# Altium PCB MY_PCB_11.PcbDoc (part 1 of 2)
Units mm, origin at the board's own origin, x right, y up, seen from the top; angles counter-clockwise.
Board outline 44.39 x 41.28 mm, 4 copper layers (L1 (SIG), L2 (GND), L3 (GND), L4 (SIG)), stack 1.57 mm thick; 69 components, 54 nets, 293 pads, 149 vias.
Unrouted connection lines stored in the file: 1.
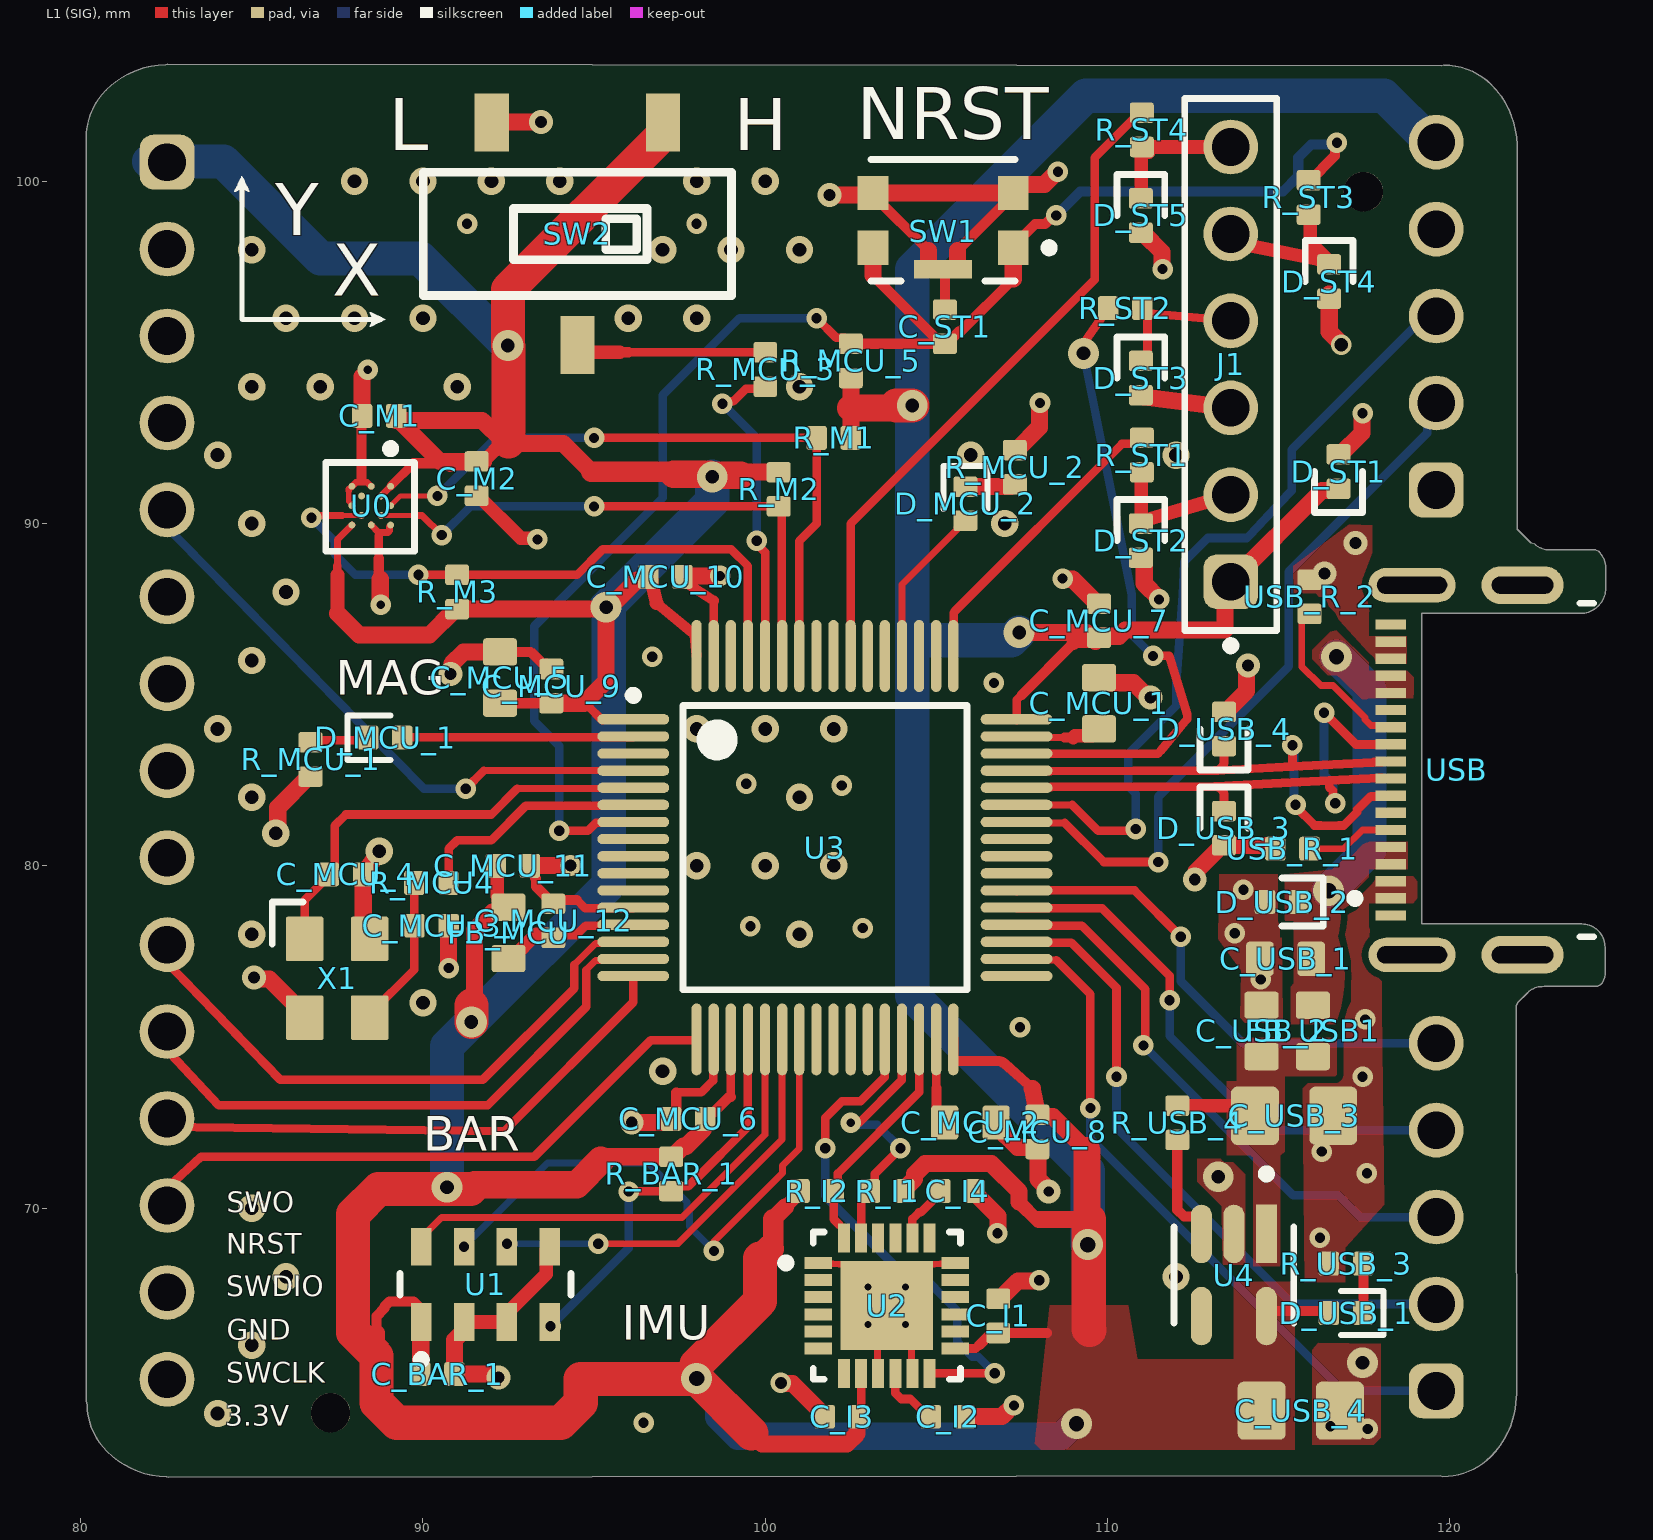
[diagram p0: L1 (SIG) view]
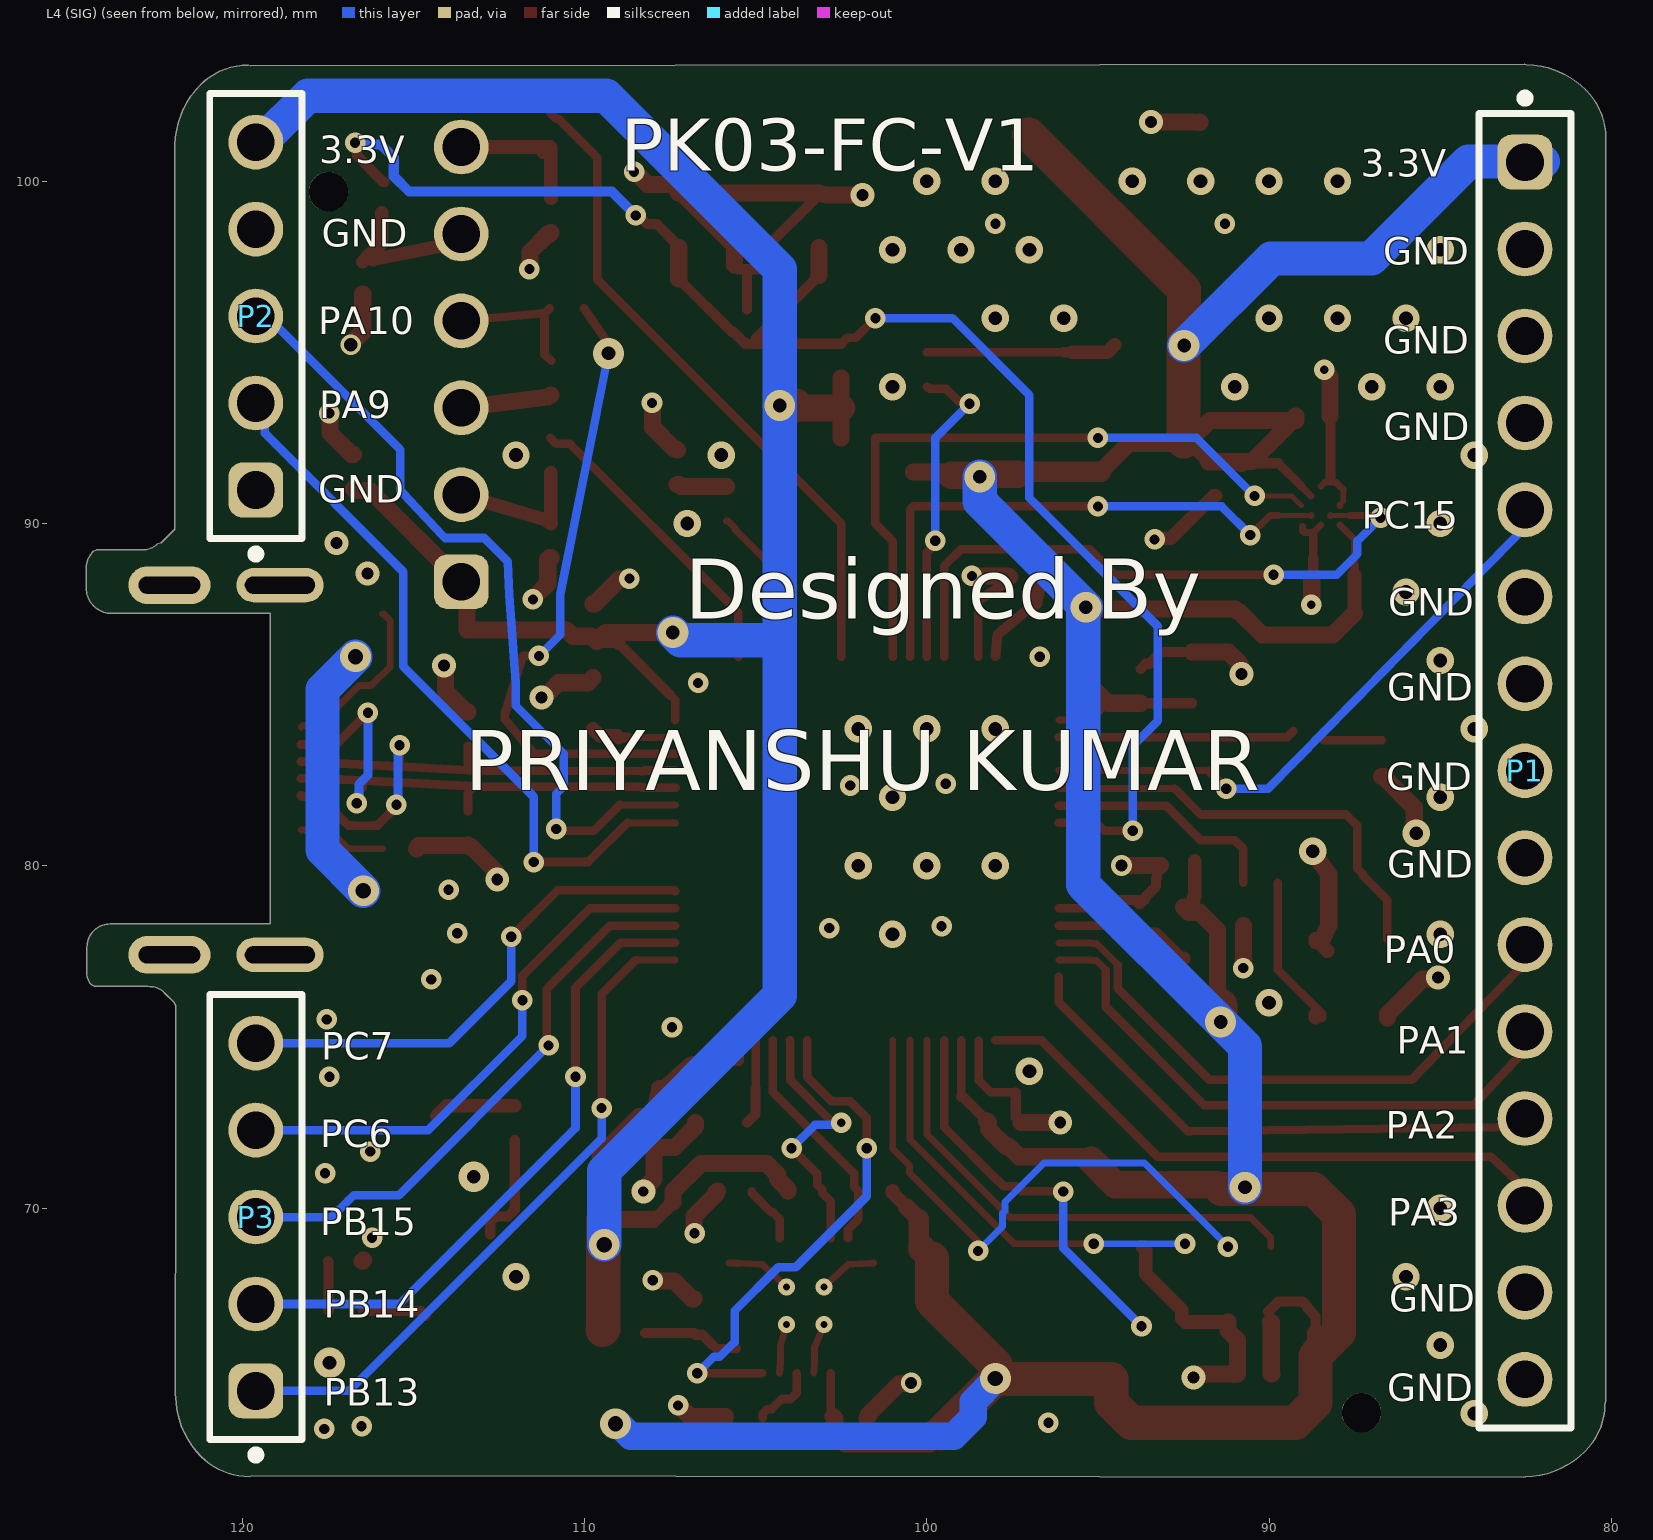
[diagram p1: L4 (SIG) view, seen from below]
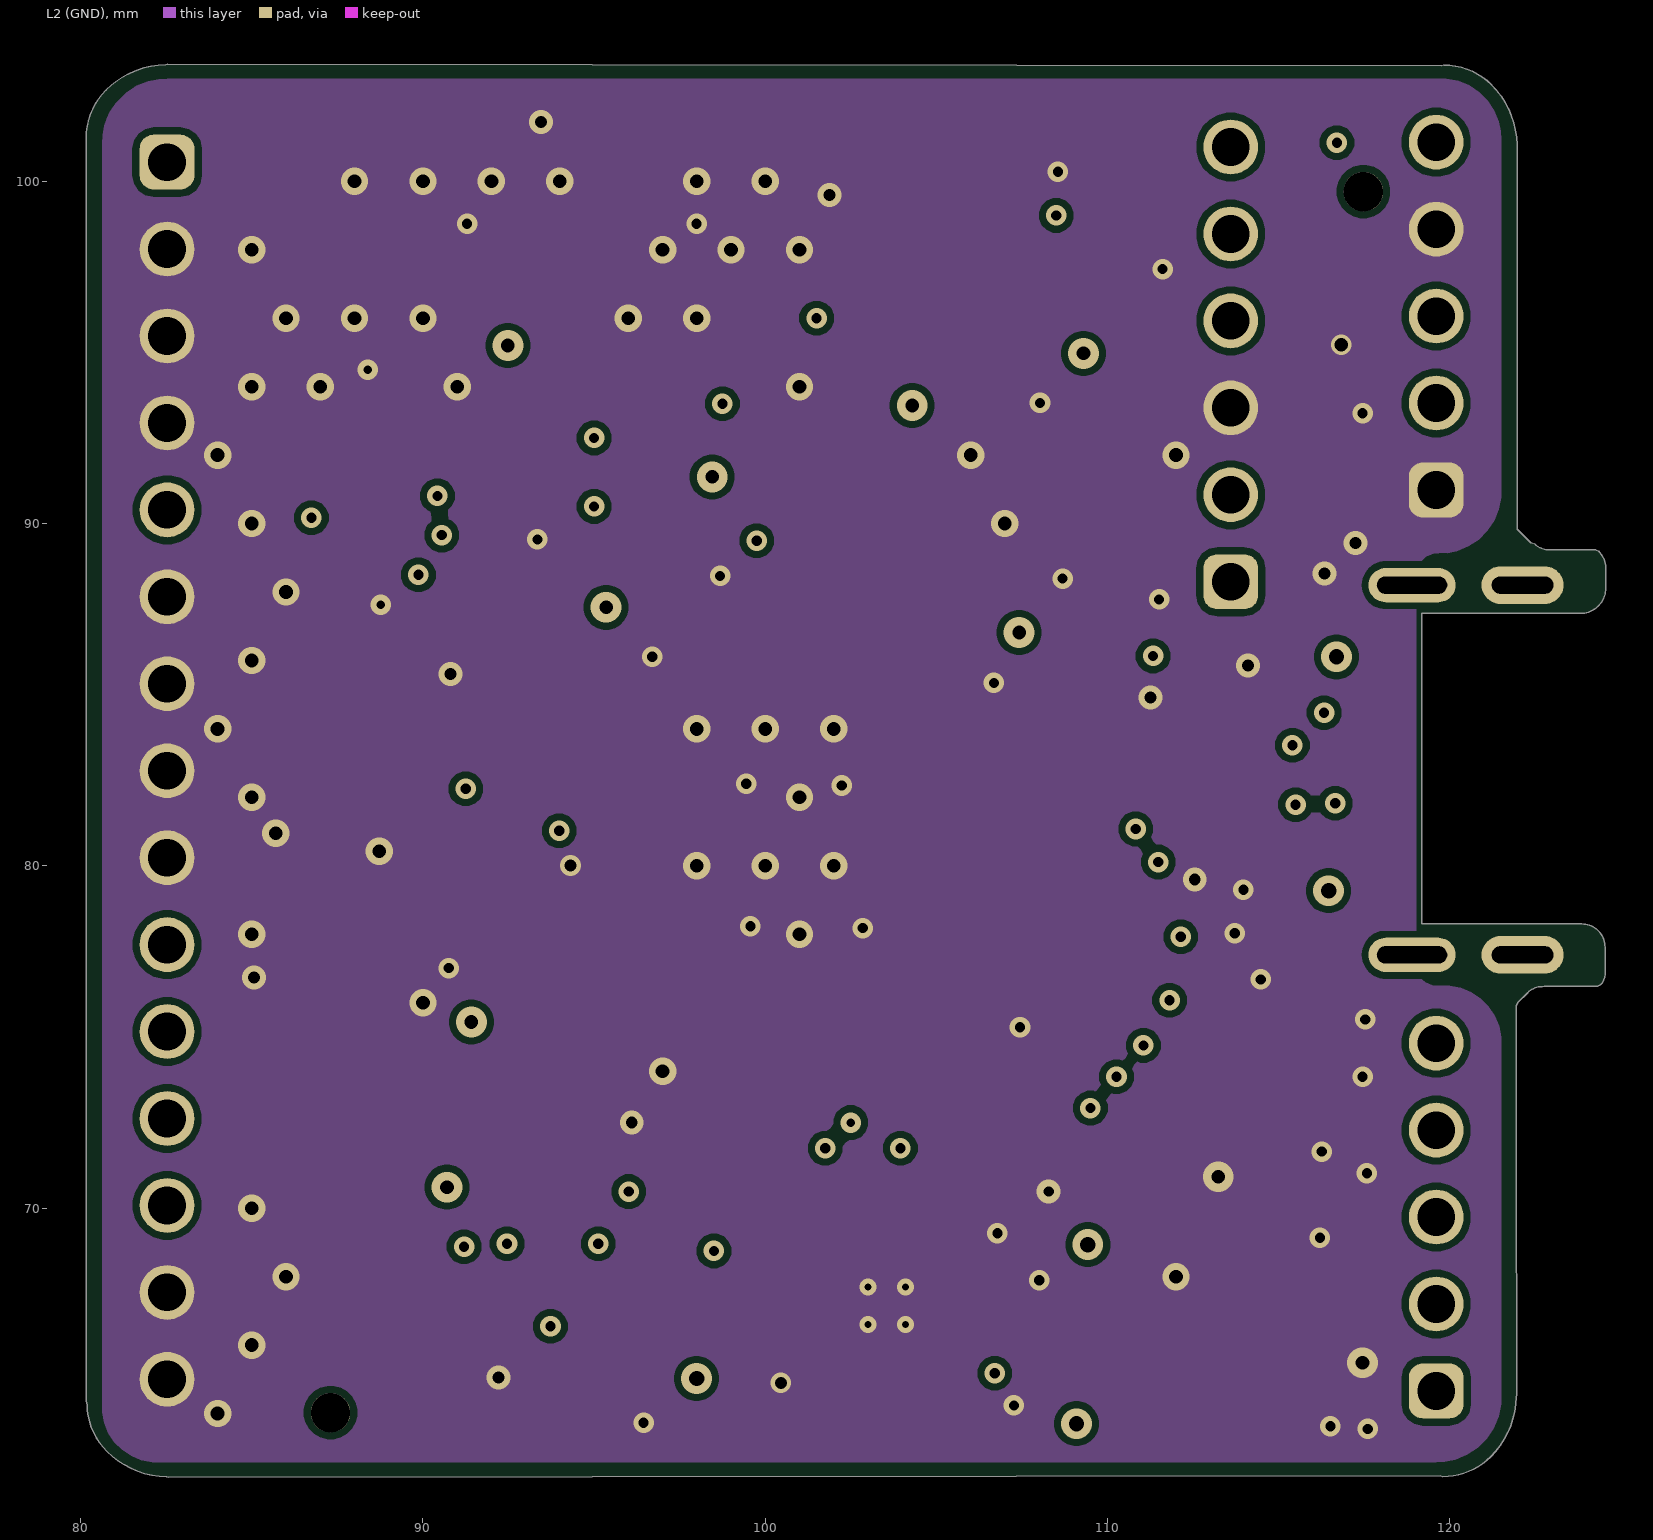
[diagram p2: L2 (GND)]
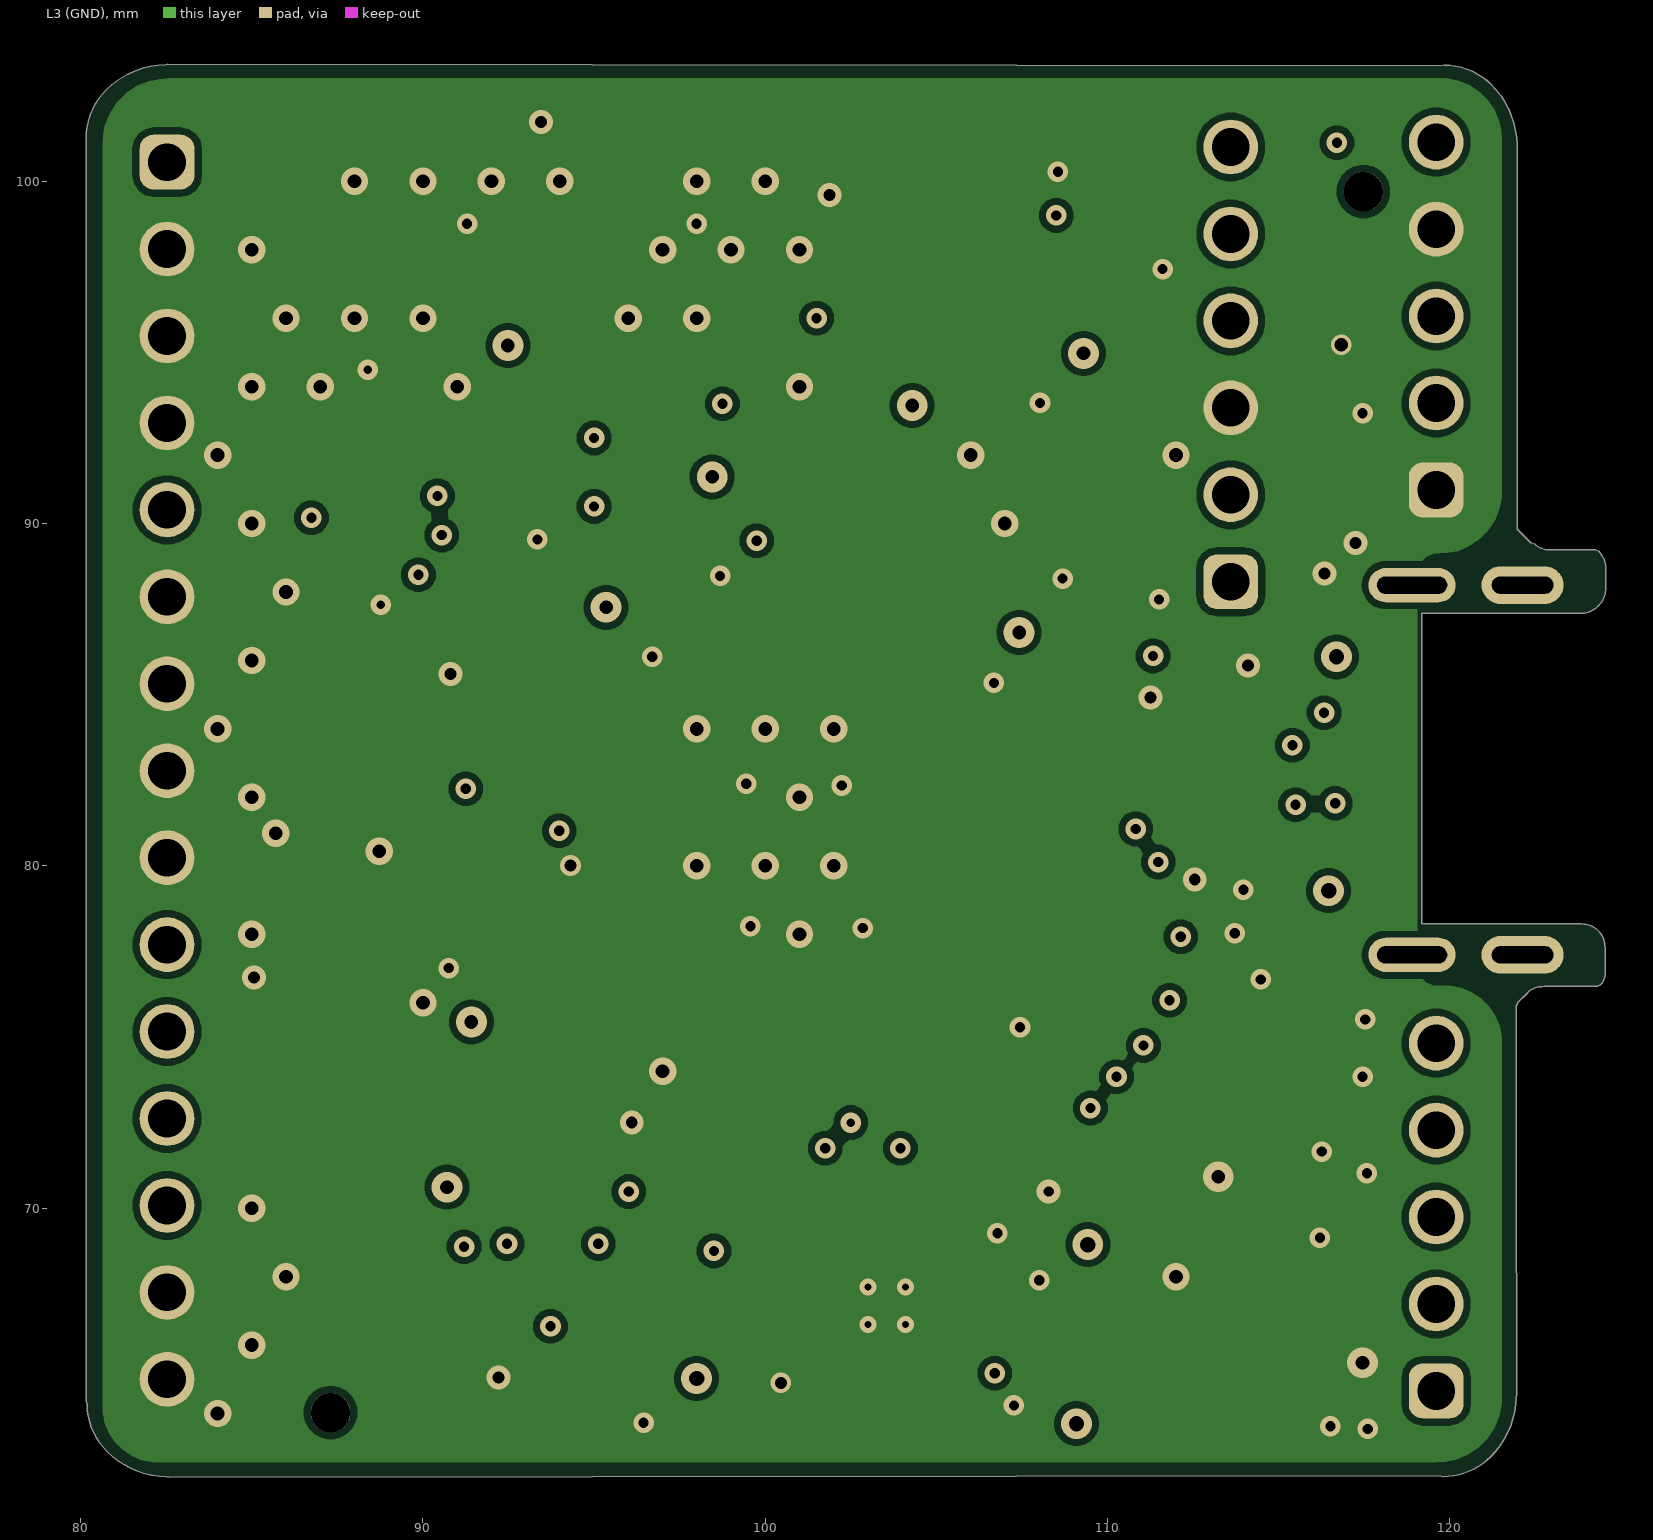
[diagram p3: L3 (GND)]
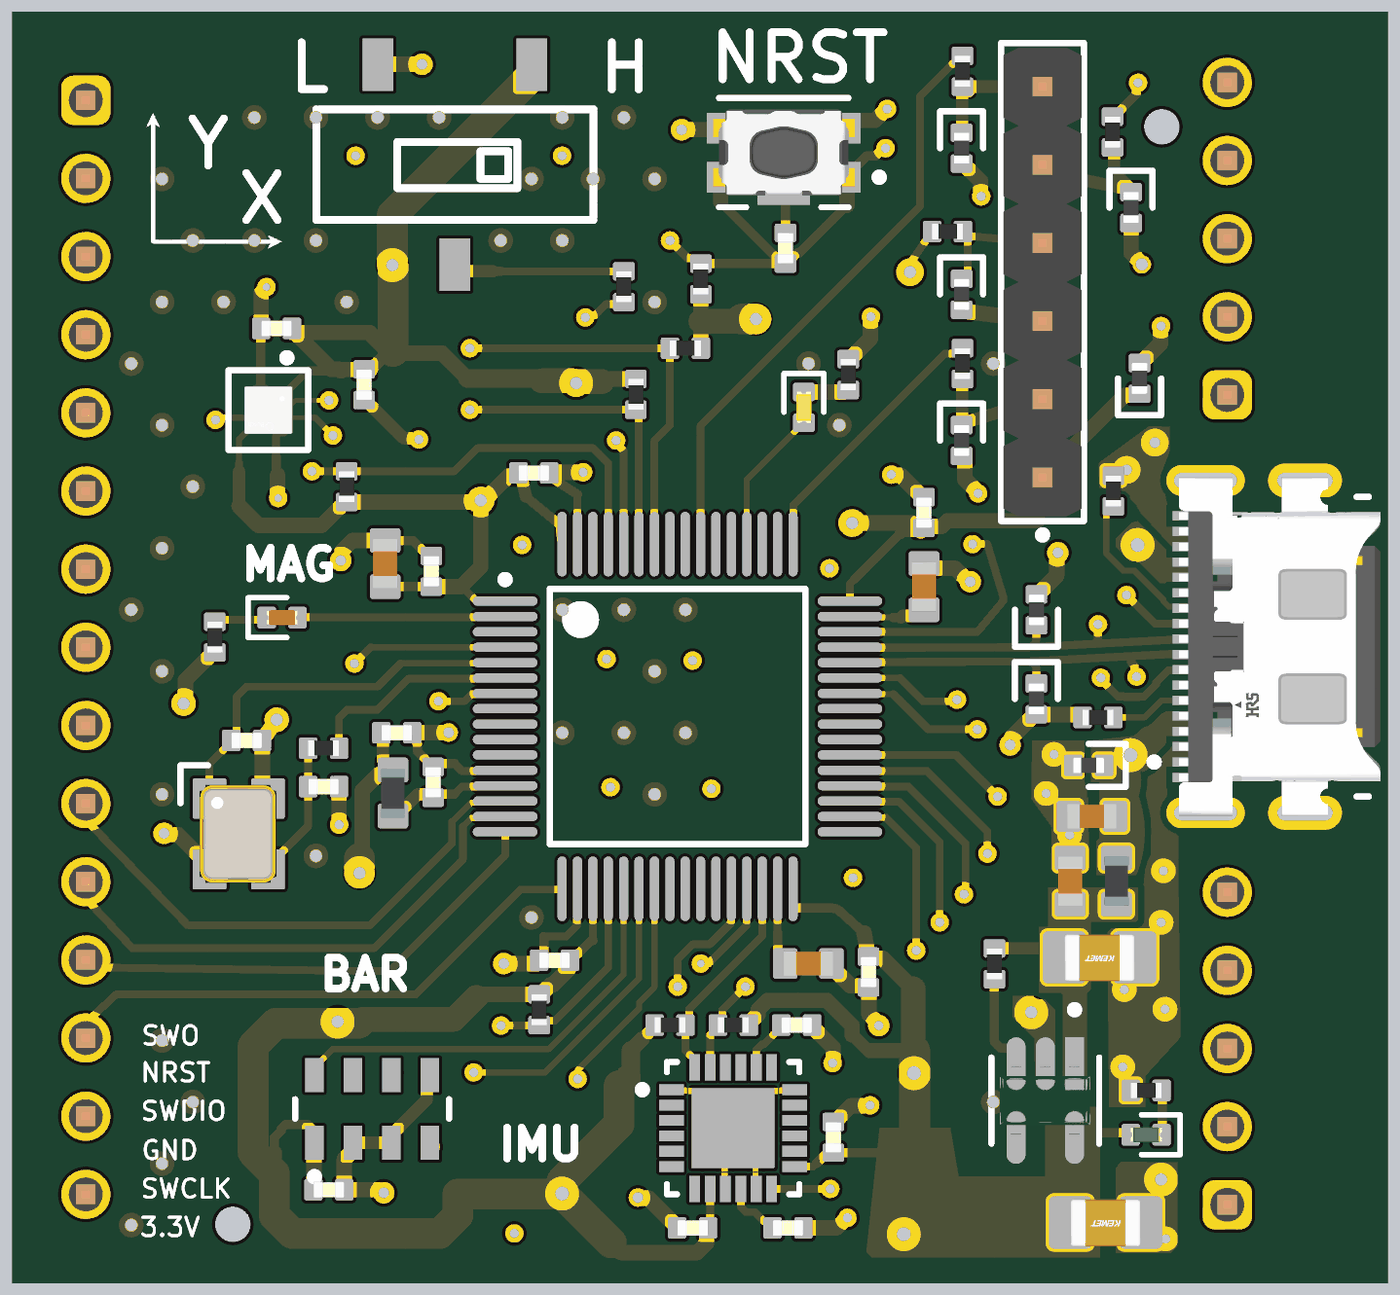
[diagram p4: 3D render of the assembled board from above, using the file's embedded part models]
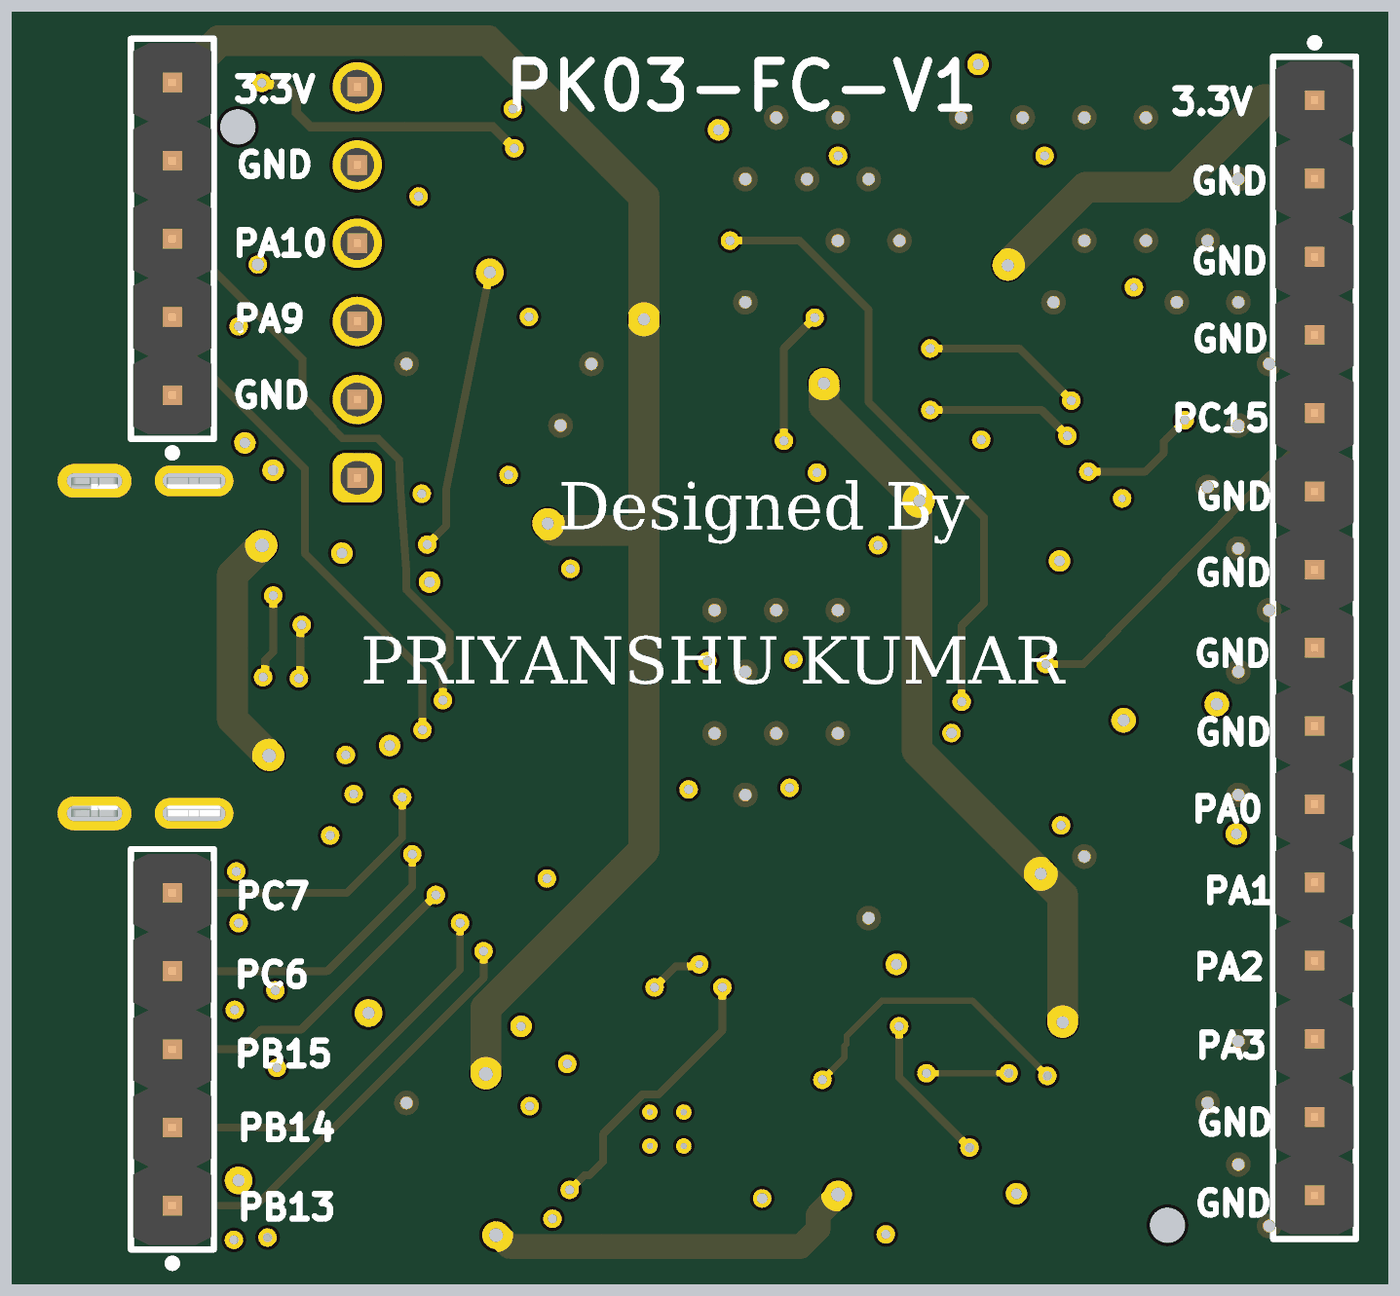
[diagram p5: 3D render of the assembled board from below, using the file's embedded part models]

## Layer stack, top to bottom
Top Solder: solder mask 0.0254, SM-001, Dk 4
L1 (SIG): signal copper 0.035
Dielectric 1: prepreg 0.2, PP-017, Dk 4.6
L2 (GND): signal copper 0.0175
Dielectric 3: core 1.065, Core-039, Dk 4.6
L3 (GND): signal copper 0.0175
Dielectric 5: prepreg 0.2, PP-017, Dk 4.6
L4 (SIG): signal copper 0.035
Bottom Solder: solder mask 0.0254, SM-001, Dk 4

## Board outline
80.768,62.894 ccw(c82.565,64.691) 82.511,62.15 82.565,62.138 119.721,62.181 119.793,62.158 ccw(c119.793,64.139) 121.194,62.739 ccw(c119.397,64.536) 121.938,64.482 121.95,64.536 121.942,71.659 121.942,75.903 121.985,76.007 122.273,76.295 cw(c122.695,75.873) 122.695,76.47 122.759,76.487 124.312,76.487 124.402,76.524 ccw(c124.082,76.844) 124.534,76.844 124.534,77.623 ccw(c123.854,77.623) 123.854,78.302 119.177,78.302 119.177,87.373 123.812,87.373 ccw(c123.812,88.116) 124.556,88.116 124.556,88.775 124.541,88.835 ccw(c123.848,88.69) 124.349,89.19 124.259,89.227 122.9,89.227 cw(c122.9,89.824) 122.478,89.402 122.362,89.437 121.968,89.83 121.968,95.679 121.974,101.018 121.962,101.072 ccw(c119.421,101.018) 121.219,102.815 ccw(c119.818,101.414) 119.818,103.395 119.75,103.376 82.54,103.419 82.486,103.407 ccw(c82.539,100.866) 80.742,102.664 ccw(c82.143,101.263) 80.162,101.263 80.162,64.356 80.188,64.254 ccw(c82.168,64.294)

## Design rules (kind name [scope] priority, off if disabled: settings)
Clearance [All] p1: gap=0.2 ignorepadtopadclearanceinfootprint=FALSE except(0.1: Arc-Arc Arc-Track Arc-SMDPad Track-Track Track-SMDPad SMDPad-SMDPad)
DiffPairsRouting [All] p1: maxlimit=0.254 minlimit=0.203 mostfreqgap=0.254 toplayer_maxgap=0.203 toplayer_prefgap=0.203 toplayer_minwidth=0.26 toplayer_maxwidth=0.26 toplayer_prefwidth=0.26 bottomlayer_maxgap=0.203 bottomlayer_prefgap=0.203 bottomlayer_minwidth=0.26 bottomlayer_maxwidth=0.26 bottomlayer_prefwidth=0.26 impedanceprofiledriven=TRUE impedanceprofileid={3583F297-3DA0-49DD-B7A2-160DF1068F61} impedanceprofilevalue=90.000000 maxuncoupledlength=12.7
MatchedLengths I2C_LIS2MDLTRT [InxSignalClass('All xSignals')] p1: tolerance=25.4 checknetsindiffpair=FALSE checkdiffpairvsdiffpair=TRUE checkxsignals=TRUE checkothers=TRUE targetsourcename=MAG_SCL_PP1
MatchedLengths SPI_BMP280 [InxSignalClass('All xSignals')] p2: tolerance=1.27 checknetsindiffpair=FALSE checkdiffpairvsdiffpair=TRUE checkxsignals=TRUE checkothers=TRUE targetsourcename=BAR_SDO_PP2
MatchedLengths USB [InDifferentialPair('USB')] p3: tolerance=2.54 checknetsindiffpair=TRUE checkdiffpairvsdiffpair=FALSE checkxsignals=FALSE checkothers=FALSE
PolygonConnect [All] p1: connectstyle=Direct reliefconductorwidth=0.254 reliefentries=4 polygonreliefangle="90 Angle" airgapwidth=0.254
RoutingVias [All] p1: holewidth=0.3 width=0.7 viastyle="Through Hole" minholewidth=0.25 minwidth=0.55 maxholewidth=0.4 maxwidth=0.9
SolderMaskExpansion [All] p1: expansion=0.102 istentingtop=FALSE
SupplyNets "Schematic Supply Nets" [InNet('GND')] p1: voltage=0.000
SupplyNets "Schematic Supply Nets_4" [InNet('VBUS')] p2: voltage=0.000
SupplyNets "Schematic Supply Nets_3" [InNet('+5V')] p3: voltage=0.000
SupplyNets "Schematic Supply Nets_1" [InNet('+3V3')] p4: voltage=0.000
UnRoutedNet [All] p1: checkbadconnections=TRUE
Width [All] p1: maxlimit=1 minlimit=0.15 preferedwidth=0.3 midlayer1_minwidth=0.254 midlayer1_maxwidth=0.254 midlayer1_prefwidth=0.254 midlayer2_minwidth=0.254 midlayer2_maxwidth=0.254 midlayer2_prefwidth=0.254 bottomlayer_minwidth=0.2 minimp=50.000000 maximp=50.000000 favimp=50.000000
28 further rules are at their usual default settings.

## Classes and differential pairs
differential pair class USB_DIFF: USB
component class Power_Supply: C_USB_1 C_USB_2 C_USB_3 C_USB_4 D_USB_1 D_USB_2 D_USB_3 D_USB_4 FB_USB1 R_USB_3 R_USB_4 U4 USB USB_R_1 USB_R_2
differential pair USB: +USB_P -USB_N

## Components (designator, comment, footprint, x,y, rotation, side; value= is the part's Value field where it differs from the comment)
C_BAR_1 "100nF_16V" CAP_0402 90.42,65.15 r180 top
C_I1 "100nF_16V" CAP_0402 106.807,66.853 r270 top
C_I2 "100nF_16V" CAP_0402 105.334,63.906 r180 top
C_I3 "10nF_16V" CAP_0402 102.235,63.906 r0 top
C_I4 "2n2F_16V" CAP_0402 105.615,70.5 r180 top
C_M1 "100nF_16V" CAP_0402 88.72,93.143 r0 top
C_M2 "100nF_16V" CAP_0402 91.567,91.313 r90 top
C_MCU_1 "2u2F_16V" CAP_0603 109.75,84.75 r270 top
C_MCU_2 "2u2F_16V" CAP_0603 105.993,72.5 r180 top
C_MCU_3 "10pF_16V" CAP_0402 90.25,78.25 r180 top
C_MCU_4 "10pF_16V" CAP_0402 87.75,79.75 r180 top
C_MCU_5 "2u2F_16V" CAP_0603 92.25,85.5 r270 top
C_MCU_6 "100nF_16V" CAP_0402 97.75,72.607 r0 top
C_MCU_7 "100nF_16V" CAP_0402 109.75,87.157 r270 top
C_MCU_8 "100nF_16V" CAP_0402 107.95,72.225 r90 top
C_MCU_9 "100nF_16V" CAP_0402 93.75,85.25 r270 top
C_MCU_10 "100nF_16V" CAP_0402 97.079,88.443 r180 top
C_MCU_11 "100nF_16V" CAP_0402 92.625,80 r180 top
C_MCU_12 "100nF_16V" CAP_0402 93.807,78.393 r270 top
C_ST1 "100nF_16V" CAP_0402 105.25,95.75 r270 top
C_USB_1 "2u2F_16V" CAP_0603 115.2,77.285 r0 top
C_USB_2 "2u2F_16V" CAP_0603 114.5,75.178 r270 top
C_USB_3 "22uF_16V" CAP_0805 115.45,72.7 r180 top
C_USB_4 "22uF_16V" CAP_0805 115.646,64.084 r180 top
D_MCU_1 "RED" LED_0402_RED 88.9,83.744 r180 top
D_MCU_2 "YELLOW" LED_0402_YELLOW 105.849,90.576 r90 top
D_ST1 "D_TVS_0402" D_0402 116.75,91.518 r270 top
D_ST2 "D_TVS_0402" D_0402 110.971,89.5 r90 top
D_ST3 "D_TVS_0402" D_0402 110.971,94.25 r90 top
D_ST4 "D_TVS_0402" D_0402 116.475,97.069 r90 top
D_ST5 "D_TVS_0402" D_0402 110.971,99 r90 top
D_USB_1 "GREEN" LED_0402_GREEN 116.967,66.936 r0 top
D_USB_2 "D_TVS_0402" D_0402 115.1,78.941 r0 top
D_USB_3 "D_TVS_0402" D_0402 113.4,81.1 r90 top
D_USB_4 "D_TVS_0402" D_0402 113.403,83.997 r270 top
FB_MCU "120R" FB_0603 92.5,78.043 r270 top
FB_USB1 "120R" FB_0603 116,75.178 r270 top
J1 "61300611121" 61300611121 113.599,94.65 r90 top
P1 "61301511121" 61301511121 82.525,82.779 r270 bottom
P2 "61300511121" 61300511121 119.6,96.06 r90 bottom
P3 "61300511121" 61300511121 119.6,69.74 r90 bottom
R_BAR_1 "10K" RES_0402 97.25,71 r270 top
R_I1 "2k2" RES_0402 103.557,70.5 r0 top
R_I2 "2k2" RES_0402 101.5,70.5 r180 top
R_M1 "2k2" RES_0402 102,92.5 r0 top
R_M2 "2k2" RES_0402 100.393,91 r90 top
R_M3 "10K" RES_0402 91,88 r90 top
R_MCU4 "49R9" RES_0402 90.25,79.5 r0 top
R_MCU_1 "560R" RES_0402 86.716,83.109 r270 top
R_MCU_2 "560R" RES_0402 107.29,91.643 r90 top
R_MCU_3 "10K" RES_0402 100,94.5 r270 top
R_MCU_5 "10K" RES_0402 102.5,94.75 r90 top
R_ST1 "22R" RES_0402 111,92 r90 top
R_ST2 "22R" RES_0402 110.515,96.291 r180 top
R_ST3 "22R" RES_0402 115.875,99.525 r90 top
R_ST4 "22R" RES_0402 111,101.5 r90 top
R_USB_3 "1k" RES_0402 116.967,68.377 r0 top
R_USB_4 "10K" RES_0402 112.039,72.492 r270 top
SW1 "KMR221GLFS" FP-KMR221GLFS-MFG 105.194,98.856 r180 top
SW2 "SW-SMD-K3-1235S-K1" SW-SMD-K3-1235S-K1 94.5,98.5 r180 top
U0 "BMM150" FP-BMM150-MFG 88.455,90.487 r270 top
U1 "MS560702BA03-50" TECO-MS560702BA03-50_V 91.825,67.775 r90 top
U2 "MPU-6050" IS-QFN-24_V 103.55,67.15 r0 top
U3 "STM32F405RGT6" STM-LQFP64_M 101.744,80.531 r0 top
U4 "AP2112K-3.3TRG1" FP-SOT25-IPC_A 113.69,68.047 r270 top
USB "CX90M-16P" FP-CX90M-16P-MFG 121.3,82.8 r90 top
USB_R_1 "5k1" RES_0402 115.4,80.5 r180 top
USB_R_2 "5k1" RES_0402 115.9,87.859 r90 top
X1 "24MHz" XTAL_3225 87.493,76.713 r270 top

## Footprints (in the part's own frame and the unit in brackets; to place one, negate y for a bottom-side part, rotate by r counter-clockwise, add the part's x,y. Pads: shape width x height; smd on the part's side, far side on the other; paste and mask are expansions set on the pad)
61300511121 [mm] "Pin Header, pitch 2.54 mm, THT, Vertical, single row, 5p"
  rrect50% 1.6x1.6 hole 1.1: 1(-5.08,0)
  round 1.6 hole 1.1: 2(-2.54,0) 3(0,0) 4(2.54,0) 5(5.08,0)
  silkscreen extent -7.07,-1.35 6.5,1.35, body extent -6.35,-1.27 6.35,1.27, height 8.57
61300611121 [mm] "Pin Header, pitch 2.54 mm, THT, Vertical, single row, 6p"
  rrect50% 1.6x1.6 hole 1.1: 1(-6.35,0)
  round 1.6 hole 1.1: 2(-3.81,0) 3(-1.27,0) 4(1.27,0) 5(3.81,0) 6(6.35,0)
  silkscreen extent -8.34,-1.35 7.77,1.35, body extent -7.62,-1.27 7.62,1.27, height 8.57
61301511121 [mm] "Pin Header, pitch 2.54 mm, THT, Vertical, single row, 15p"
  rrect50% 1.6x1.6 hole 1.1: 1(-17.78,0)
  round 1.6 hole 1.1: 2(-15.24,0) 3(-12.7,0) 4(-10.16,0) 5(-7.62,0) 6(-5.08,0) 7(-2.54,0) 8(0,0) 9(2.54,0) 10(5.08,0) 11(7.62,0) 12(10.16,0) 13(12.7,0) 14(15.24,0) 15(17.78,0)
  silkscreen extent -19.77,-1.35 19.2,1.35, body extent -19.05,-1.27 19.05,1.27, height 8.57
CAP_0402 [mm]
  rrect25% 0.6x0.7 smd: 1(-0.5,0) 2(0.5,0)
  body extent -0.5,-0.26 0.5,0.26, height 0.37
CAP_0603 [mm]
  rrect25% 0.8x1 smd: 1(-0.75,0) 2(0.75,0)
  body extent -0.8,-0.4 0.8,0.4, height 0.51
CAP_0805 [mm]
  rrect25% 1.4x1.7 smd: 1(-1.143,0) 2(1.143,0)
  body extent -1.15,-0.76 1.15,0.79, height 1.01
D_0402 [mm]
  rrect25% 0.6x0.7 smd: A(-0.5,0) K(0.5,0)
  silkscreen extent 0,-0.7 1.2,0.7, body extent -0.5,-0.25 0.5,0.25, height 0.51
FB_0603 [mm]
  rrect25% 0.8x1 smd: 1(-0.75,0) 2(0.75,0)
  body extent -0.8,-0.4 0.8,0.4, height 0.81
FP-BMM150-MFG [mm]
  round 0.2 smd paste+0 mask+0: A1(-0.601,0.601) A3(-0.035,0.601) A5(0.531,0.601) B2(-0.318,0.318) B4(0.248,0.318) C1(-0.601,0.035) C5(0.531,0.035) D2(-0.318,-0.248) D4(0.248,-0.248) E1(-0.601,-0.531) E3(-0.035,-0.531) E5(0.531,-0.531)
  silkscreen extent -1.82,-1.3 1.3,1.29, body extent -1.3,-1.3 1.3,1.29, height 0.25
FP-CX90M-16P-MFG [mm]
  rect 0.3x0.9 smd paste+0 mask+0: 1(-4.25,3.025) 2(4.25,3.025) A1(-3.75,3.025) A4(-2.75,3.025) A5(-1.75,3.025) A6(-0.75,3.025) A7(0.75,3.025) A8(1.75,3.025) A9(2.75,3.025) A12(3.75,3.025) B1(3.25,3.025) B4(2.25,3.025) B5(1.25,3.025) B6(0.25,3.025) B7(-0.25,3.025) B8(-1.25,3.025) B9(-2.25,3.025) B12(-3.25,3.025)
  rrect100% 1x2.55 hole 2.05 slot 0.5 at 0 deg paste-2539.97 mask+0: 3(-5.4,2.405) 4(5.4,2.405)
  rrect100% 1.1x2.4 hole 1.8 slot 0.5 at 0 deg paste-2539.97 mask+0: 5(-5.4,-0.825) 6(5.4,-0.825)
  silkscreen extent -4.87,-2.9 4.87,4.2, body extent -6.05,-3.37 6.05,3.78, height 0.25
FP-KMR221GLFS-MFG [mm]
  rect 0.9x1 smd paste+0 mask+0: 1(-2.05,0.8) 2(2.05,0.8) 3(-2.05,-0.8) 4(2.05,-0.8)
  rect 1.7x0.55 smd paste+0 mask+0: 5(0,1.425)
  silkscreen extent -3.22,-1.78 2.1,1.77, body extent -2.6,-1.5 2.6,1.8, height 0.25
FP-SOT25-IPC_A [mm]
  rect 1.707x0.616 smd paste+0 mask+0: 1(-1.201,0.95)
  rrect100% 1.707x0.616 smd paste+0 mask+0: 2(-1.201,0) 3(-1.201,-0.95) 4(1.201,-0.95) 5(1.201,0.95)
  silkscreen extent -3.08,-1.75 1.4,1.75, body extent -2.55,-2 2.55,2, height 0.25
IS-QFN-24_V [mm] "QFN, 24-Leads, Body 4x4mm, Pitch 0.5mm, Thermal Pad 2.7x2.6mm"
  rect 0.8x0.35 smd: 1(-2,1.25) 2(-2,0.75) 3(-2,0.25) 4(-2,-0.25) 5(-2,-0.75) 6(-2,-1.25) 13(2,-1.25) 14(2,-0.75) 15(2,-0.25) 16(2,0.25) 17(2,0.75) 18(2,1.25)
  rect 0.35x0.85 smd mask+0.102: 7(-1.25,-1.975) 8(-0.75,-1.975) 9(-0.25,-1.975) 10(0.25,-1.975) 11(0.75,-1.975) 12(1.25,-1.975) 19(1.25,1.975) 20(0.75,1.975) 21(0.25,1.975) 22(-0.25,1.975) 23(-0.75,1.975) 24(-1.25,1.975)
  rect 2.7x2.6 smd: 25(0,0)
  silkscreen extent -3.07,-2.15 2.15,2.15, body extent -2,-2 2,2, height 0.95
LED_0402_GREEN [mm]
  rrect25% 0.6x0.7 smd: A(-0.5,0) K(0.5,0)
  silkscreen extent -0.15,-0.65 1.1,0.65, body extent -0.51,-0.25 0.51,0.25, height 0.45
LED_0402_RED [mm]
  rrect25% 0.6x0.7 smd: A(-0.5,0) K(0.5,0)
  silkscreen extent -0.15,-0.65 1.1,0.65, body extent -0.51,-0.25 0.51,0.25, height 0.45
LED_0402_YELLOW [mm]
  rrect25% 0.6x0.7 smd: A(-0.5,0) K(0.5,0)
  silkscreen extent -0.15,-0.65 1.1,0.65, body extent -0.51,-0.25 0.51,0.25, height 0.45
RES_0402 [mm]
  rrect25% 0.6x0.7 smd: 1(-0.5,0) 2(0.5,0)
  body extent -0.5,-0.25 0.5,0.25, height 0.3
STM-LQFP64_M [mm] "Thin QFP, 64-Leads, Body 10x10mm, Pitch 0.5mm, IPC Low Density"
  oval 2.1x0.3 smd: 1(-5.6,3.75) 2(-5.6,3.25) 3(-5.6,2.75) 3(5.6,-3.75) 4(-5.6,2.25) 5(-5.6,1.75) 6(-5.6,1.25) 7(-5.6,0.75) 8(-5.6,0.25) 9(-5.6,-0.25) 10(-5.6,-0.75) 11(-5.6,-1.25) 12(-5.6,-1.75) 13(-5.6,-2.25) 14(-5.6,-2.75) 15(-5.6,-3.25) 16(-5.6,-3.75) 34(5.6,-3.25) 35(5.6,-2.75) 36(5.6,-2.25) 37(5.6,-1.75) 38(5.6,-1.25) 39(5.6,-0.75) 40(5.6,-0.25) 41(5.6,0.25) 42(5.6,0.75) 43(5.6,1.25) 44(5.6,1.75) 45(5.6,2.25) 46(5.6,2.75) 47(5.6,3.25) 48(5.6,3.75)
  oval 0.3x2.1 smd: 17(-3.75,-5.6) 18(-3.25,-5.6) 19(-2.75,-5.6) 20(-2.25,-5.6) 21(-1.75,-5.6) 22(-1.25,-5.6) 23(-0.75,-5.6) 24(-0.25,-5.6) 25(0.25,-5.6) 26(0.75,-5.6) 27(1.25,-5.6) 28(1.75,-5.6) 29(2.25,-5.6) 30(2.75,-5.6) 31(3.25,-5.6) 32(3.75,-5.6) 49(3.75,5.6) 50(3.25,5.6) 51(2.75,5.6) 52(2.25,5.6) 53(1.75,5.6) 54(1.25,5.6) 55(0.75,5.6) 56(0.25,5.6) 57(-0.25,5.6) 58(-0.75,5.6) 59(-1.25,5.6) 60(-1.75,5.6) 61(-2.25,5.6) 62(-2.75,5.6) 63(-3.25,5.6) 64(-3.75,5.6)
  silkscreen extent -5.72,-4.15 4.15,4.57, body extent -5,-5 5,5, height 1.6
SW-SMD-K3-1235S-K1 [mm]
  rect 1x1.7 smd: 1(-2.512,-3.214) 2(-0.012,3.286) 3(2.488,-3.214)
  silkscreen extent -4.51,-1.76 4.49,1.84
TECO-MS560702BA03-50_V [mm] "SMD, 8-Leads, Body 3x5mm, Pitch 1.25mm"
  rect 1.1x0.6 smd: 1(-1.1,1.875) 2(-1.1,0.625) 3(-1.1,-0.625) 4(-1.1,-1.875) 5(1.1,-1.875) 6(1.1,-0.625) 7(1.1,0.625) 8(1.1,1.875)
  silkscreen extent -2.32,-2.5 0.32,2.5, body extent -1.5,-2.5 1.5,2.5, height 1
XTAL_3225 [mm]
  rrect10% 1.3x1.1 smd: 1(-1.15,-0.95) 2(1.15,-0.95) 3(1.15,0.95) 4(-1.15,0.95)
  silkscreen extent -2.23,-1.89 -1,-1, body extent -1.6,-1.28 1.6,1.23, height 0.61

## Part data
C_BAR_1 C_I1 C_I2 C_I3 C_I4 C_M1 C_M2 C_MCU_3 C_MCU_4 C_MCU_6 C_MCU_7 C_MCU_8 C_MCU_9 C_MCU_10 C_MCU_11 C_MCU_12 C_ST1: library part CAP_0402, "Capacitor SMD 0402"
C_MCU_1 C_MCU_2 C_MCU_5 C_USB_1 C_USB_2: library part CAP_0603, "Capacitor SMD 0603"
C_USB_3 C_USB_4: library part CAP_0805, "Capacitor SMD 0805"
D_MCU_1: library part LED_0402_RED, "LED 0402 RED SMD"
D_MCU_2: library part LED_0402_YELLOW, "LED 0402 YELLOW SMD"
D_ST1 D_ST2 D_ST3 D_ST4 D_ST5 D_USB_2 D_USB_3 D_USB_4: "Diode TVS / ESD 0402"
D_USB_1: library part LED_0402_GREEN, "LED 0402 GREEN SMD"
FB_MCU FB_USB1: library part FB_0603, "Ferrite Bead SMD 0603"
J1: library part CMP-1502-01070-3, Color=Black, Contact Resistance=20mΩ, Current Rating=3A, Max Operating Temperature=105°C, Min Operating Temperature=-40°C, Operating Supply Voltage=250V, Connector Type="Male Pin", Contact Gender=Male, Contact Material=Copper, Contact Mating Length=5.9944mm, Contact Plating=Gold, Gender=Male, Height=8.89mm, Housing Material=PBT, Lead Free="Lead Free", Lead Pitch=2.54mm, Mount="Through Hole", NexarPartId=20084590, Number Of Contacts=6, Number of Pins=6, Number of Positions=6, Number of Rows=1, Orientation=Vertical, Packaging=Bulk, Pitch=2.54mm, REACH SVHC=Unknown, RoHS=Compliant, Termination="Through Hole", Voltage Rating=250V
P1: library part CMP-207987-000006-3, "CONN HEADER VERT 15POS 2.54MM", Color=Black, Current Rating=3A, Max Operating Temperature=105°C, Min Operating Temperature=-40°C, Voltage Rating=250V, Connector Type="Male Pin", Contact Material=Copper, Contact Mating Length=5.9944mm, Contact Plating=Gold, Gender=Male, Height=8.89mm, Mount="Through Hole", NexarPartId=32855546, Number Of Contacts=15, Number of Positions=15, Number of Rows=1, Packaging=Bulk, Pitch=2.54mm, REACH SVHC=Unknown, RoHS=Compliant, Termination=Solder
P2 P3: library part CMP-1502-01068-3, Color=Black, Contact Resistance=20mΩ, Current Rating=3A, Max Operating Temperature=105°C, Min Operating Temperature=-40°C, Operating Supply Voltage=250V, Connector Type="Male Pin", Contact Material=Copper, Contact Mating Length=5.9944mm, Contact Plating=Gold, Gender=Male, Height=8.89mm, Lead Free="Lead Free", Lead Pitch=2.54mm, Mount="Through Hole", NexarPartId=32855526, Number Of Contacts=5, Number of Pins=5, Number of Positions=5, Number of Rows=1, Orientation=Vertical, Packaging=Bulk, Pitch=2.54mm, REACH SVHC=Unknown, RoHS=Compliant, Termination=Solder, Voltage Rating=250V
R_BAR_1 R_I1 R_I2 R_M1 R_M2 R_M3 R_MCU4 R_MCU_1 R_MCU_2 R_MCU_3 R_MCU_5 R_ST1 R_ST2 R_ST3 R_ST4 R_USB_3 R_USB_4 USB_R_1 USB_R_2: library part RES_0402, "Resistor SMD 0402"
SW1: library part CMP-10040-000018-1, "SWITCH TACTILE SPST-NO 0.05A 32V", Case/Package=SMD/SMT, Contact Current Rating=50mA, Contact Resistance=100mR, Max Operating Temperature=85°C, Max Voltage Rating (DC)=32V, Min Operating Temperature=-40°C, Operating Force=2N, Package Quantity=1, Power Rating=1W, Actuator Length=0.5mm, Actuator Type=Standard, Contact Material=Silver, Contact Plating=Silver, Current Rating=50mA, Depth=4.6mm, Illumination Type=Non-Illuminated, Lead Free="Lead Free", Length=2.8mm, Max Current Rating=50mA, Mechanical Life=200000Cycles, Mount="Surface Mount", Orientation=Straight, Packaging="Tape and Reel", Radiation Hardening=No, REACH SVHC="No SVHC", Switch Function=Off-Mom, Switch Travel=0.25mm, Termination="Gull Wing", Throw Configuration=SPST, Voltage Rating (DC)=32V, Width=2.8mm
U0: library part CMP-191063-000001-2, "SENSOR FLIPCORE/HALL SPI 12WLCSP", Case/Package=SMD/SMT, Max Operating Temperature=85°C, Max Supply Current=20mA, Min Operating Temperature=-40°C, Operating Supply Voltage=3.6V, Package Quantity=10000, Axis="X, Y, Z", Bandwidth=10Hz, Output Type=SPI, Packaging="Tape and Reel", Resolution=13b
U1: library part CMP-2000-07512-1, "Barometric Pressure Sensor, with Stainless Steel Cap , 1.8 to 3.6 V, -40 to 85 degC, 8-Pin SMD, RoHS, Tape and Reel", Manufacturer="TE Connectivity", Package Description="8-Pin Surface Mount Device, Body 3 x 5 mm, Pitch 1.25 mm", Datasheet URL=http://www.te.com/commerce/DocumentDelivery/DDEController?Action=showdoc&DocId=Data+Sheet%7FMS5607-02BA03%7FB2%7Fpdf%7FEnglish%7FENG_DS_MS5607-02BA03_B2.pdf%7FMS560702BA03-50, Datasheet Version=06/2017, Lead Free=LeadFree, Manufacturer URL=http://www.te.com/, Mounting Technology=SurfaceMount, Package Reference=MS560702BA03-50, RoHSCompliant=false
U2: library part CMP-1753-00002-2, "3-Axis Gyroscope, Accelerometer and a Digital Motion Processor(TM) (DMP), 2.375 to 3.46 V, -40 to 85 degC, 24-Pin QFN, RoHS, Tape and Reel", Manufacturer=InvenSense, Standard Package=5,000, Category=Sensors,Transducers, Datasheet URL=http://datasheet.octopart.com/MPU-6050-InvenSense-datasheet-14421344.pdf, Datasheet Version="Rev. 3.3, 05/2012", Dynamic Catalog=MPU-6000™Series, Family=Multifunction, Featured Product=MPU-60506-Axis,IntegratedI²CSolution, Manufacturer URL=http://www.invensense.com/, Online Catalog=MPU-6000™Series, Other Names="1428-1007-2 / MPU6050", Output Type=Digital, Sensor Type=MotionTracking, Unit PriceUSD=Digital
U3: library part CMP-0243-00019-3, "ARM Cortex-M4 32-bit MCU+FPU, 210 DMIPS, 1024 kB Flash, 192 kB Internal RAM, 51 I/Os, 64-pin LQFP, -40 to 85 degC, Tray", I/Os (High Current)=51, Manufacturer=STMicroelectronics, Operating Frequency(F) (Processor speed) (MHz)=168, Supply Voltage(Vcc) max (V)=3.6, Supply Voltage(Vcc) min (V)=1.8, ComponentLink1Description="Manufacturer URL", ComponentLink1URL=http://www.st.com/web/en/home.html, ComponentLink2Description=Datasheet, ComponentLink2URL=http://www.st.com/st-web-ui/static/active/en/resource/technical/document/datasheet/DM00037051.pdf, ComponentLink3Description="Package Specification", ComponentLink3URL=http://www.st.com/st-web-ui/static/active/en/resource/technical/document/datasheet/DM00037051.pdf, Core="ARM Cortex-M4", D/A Converter=2x12-bit, DatasheetVersion="Rev. 4", FLASH Size (Prog) (kB)=1024, Internal RAM Size (kB)=192, Mounting Technology="Surface Mount", PackageDescription="64-Pin Low Profile Quad Flat Package, 10 x 10 mm Body, 0.5 mm Pitch", PackageReference=LQFP64, PackageVersion="Rev. 4, 06/2013", Packing=Tray, PartNumber=STM32F405RGT6
U4: library part CMP-12756-000035-1, "IC REG LINEAR 3.3V 600MA SOT25", Case/Package=SOT-23-5, Dropout Voltage=250mV, Max Input Voltage=6V, Max Operating Temperature=85°C, Max Output Current=600mA, Min Input Voltage=2.5V, Min Operating Temperature=-40°C, Output Voltage=3.3V, Package Quantity=1, Quiescent Current=55uA, Accuracy=1.5%, Height=1.3mm, Lead Free="Lead Free", Length=3.1mm, Mount="Surface Mount", Number of Outputs=1, Number of Pins=5, Number of Regulators=1, Output Current=600mA, Output Type=Fixed, Packaging="Tape and Reel", Polarity=Positive, Width=1.7mm
USB: library part CMP-11601-000005-1, "CONN RCPT USB2.0 TYPEC 16POS SMD", Current Rating=1.25A, Flammability Rating="UL94 V-0", Insulation Color=Black, Max Operating Temperature=85°C, Min Operating Temperature=-30°C, Connector Type=USB, Contact Plating=Gold, Gender=Receptacle, Mating Cycles=10000, Mount="Surface Mount", Number Of Contacts=16, Number of Ports=1, Packaging="Cut Tape", Shielding=Shielded, Termination=Solder
X1: library part TSX-3225_24.0000MF15X-AC, "Crystal SMD 24MHz 10PPM 7pF 3225", Manufacturer=Epson, Manufacturer Part Number="TSX-3225 24.0000MF15X-AC"

## Free pads (board coordinates)
  round 1.152 hole 1.152 unplated: TH(87.3,64.025) TH(117.475,99.695)

## Via types
v1: diameter 0.6, hole 0.3, L1 (SIG) to L4 (SIG), 66 vias
v2: diameter 0.8, hole 0.4, L1 (SIG) to L4 (SIG), tented both sides, 44 vias
v3: diameter 0.7, hole 0.35, L1 (SIG) to L4 (SIG), 11 vias
v4: diameter 0.9, hole 0.4, L1 (SIG) to L4 (SIG), 10 vias
v5: diameter 0.9, hole 0.45, L1 (SIG) to L4 (SIG), 5 vias
v6: diameter 0.5, hole 0.2, L1 (SIG) to L4 (SIG), 4 vias
v7: diameter 0.6, hole 0.25, L1 (SIG) to L4 (SIG), 3 vias
v8: diameter 0.8, hole 0.4, L1 (SIG) to L4 (SIG), 2 vias
v9: diameter 0.6, hole 0.35, L1 (SIG) to L4 (SIG), 2 vias
v10: diameter 0.6, hole 0.4, L1 (SIG) to L4 (SIG), 1 vias
v11: diameter 0.7, hole 0.3, L1 (SIG) to L4 (SIG), 1 vias

## Nets (pads, with @x,y where several pads share a name; then routed paths per layer and width w, separated by ;. In a path a pad name is that pad's centre, name@x,y a point inside that pad or via, vN(x,y) a via of type N, cw(c..) or ccw(c..) an arc to the next point about the centre after c; other vN are vias at no path point)
+3V3: C_BAR_1.2 C_I1.2 C_I3.2 C_M1.2 C_M2.2 C_MCU_5.2 C_MCU_6.2 C_MCU_7.2 C_MCU_8.2 C_MCU_9.2 C_MCU_10.2 C_MCU_11.2 C_USB_4.2 D_ST1.K D_USB_1.A FB_MCU.1 J1.1 P1.1 P2.5 R_BAR_1.1 R_I1.2 R_I2.2 R_M1.2 R_M2.2 R_M3.1 R_MCU_5.1 SW2.1 U0.A1 U0.B2 U0.E5 U1.1 U2.8 U2.13 U3.1 U3.19 U3.32 U3.48 U3.64 U4.5 | length 249.2
  L1 (SIG) w0.2: 87.503,88.773 87.503,89.535 U0.E5 ; U0.B2 U0.A1 ; U3.1@95.239,84.256 U3.1@96.144,84.256 ; 98.994,73.256 99,73.25
  L1 (SIG) w0.25: 87.503,88.494 87.503,88.773 ; U0.A1 89.731,91.762 ; 94.795,84.7 U3.1@95.239,84.256 ; 98.994,73.256 U3.19@98.994,74.906 ; C_I3.2@102.8,63.757 C_I3.2@102.807,63.75 ; C_I3.2@102.8,64.1 102.8,64.75 U2.8 ; U2.13 106.15,65.9 106.25,66 ; U3.48@107.344,84.256 U3.48 107.344,84.844 107.5,85
  L1 (SIG) w0.3: 88.646,66.345 88.646,66.846 88.875,67.075 88.875,67.125 89.025,67.275 89.721,67.275 U1.1@90.021,66.975 ; 89.731,91.762 90.512,91.762 ; 90.813,91.762 90.856,91.806 ; C_MCU_5.2 C_MCU_9.2 ; 94.51,84.7 94.795,84.7 ; 96.822,87.679 96.884,87.617 97.845,86.832 97.932,86.746 U3.64 ; C_MCU_6.2@98.1,72.4 98.2,72.5 C_MCU_6.2@98.25,72.55 ; C_MCU_6.2@98.25,72.5 C_MCU_6.2@98.25,72.55 ; 99,73.25 98.95,73.25 C_MCU_6.2@98.25,72.55 ; U3.32 105.494,74.3 106.786,74.3 cw(c106.786,74) 106.985,74.224 107.8,73.5 ; 106.25,66 106.551,66.301 C_I1.2@106.755,66.301 ; C_I1.2 108.228,66.353 ; 107.5,85 109,86.5 ; U4.5 114.64,66.85 114.786,66.996 D_USB_1.A@116.467,66.996
  L1 (SIG) w0.4: 87.503,87.376 87.503,88.494 ; C_M2.2@91.763,91.806 92.35,92.393 92.5,92.393 ; C_MCU_11.2@92.175,80.139 92.175,79.118 92.2,79.093 92.2,78.993 92.4,78.793 FB_MCU.1 ; C_MCU_10.2 96.679,88.293 96.822,87.679 ; 100.584,70.034 101,70.45 R_I2.2 ; 107.417,70.18 107.963,69.634 ; 109,86.5 109.057,86.557 109.65,86.557 C_MCU_7.2
  L1 (SIG) w0.5: 87.503,87.376 88.138,86.741 90.191,86.741 90.9,87.45 90.95,87.45 R_M3.1 95.298,87.5 v4(95.352,87.554) ; 88.646,65.684 88.646,66.345 ; C_M1.2@89.22,93.012 C_M1.2@89.25,93.012 ; C_M1.2 89.22,93.093 C_M1.2@89.25,93.063 ; C_M1.2@89.25,93.113 C_M1.2@89.25,93.063 ; C_BAR_1.2 89.935,65.165 89.935,66.66 U1.1 ; 90.813,91.762 90.763,91.812 90.501,91.812 C_M1.2@89.301,93.012 ; 90.856,91.806 C_M2.2@91.763,91.806 ; v4@91.415,75.546 91.504,75.636 91.504,78.118 92.028,78.643 92.35,78.643 FB_MCU.1 ; 92.35,92.393 91.73,93.012 C_M1.2@89.301,93.012 ; 92.85,92.339 94.1,92.339 94.923,91.516 ; C_MCU_9.2 94.51,84.75 94.703,84.75 95.352,85.399 v4(95.352,87.554) ; 95.199,71.399 95.3,71.5 R_BAR_1.1 97.3,71.5 97.607,71.807 97.692,71.807 98.2,72.315 98.2,72.5 98.2,72.507 98.243,72.55 C_MCU_6.2@98.25,72.55 ; C_MCU_10.2@96.629,88.343 96.249,88.343 95.46,87.554 v4(95.352,87.554) ; 97.257,91.516 97.332,91.44 ; v4@98.374,91.44 v4(98.45,91.364) v4@98.5,91.414 ; 99.289,91.414 99.376,91.5 R_M2.2 ; 99.593,63.424 99.911,63.106 102.38,63.106 102.685,63.412 102.685,63.856 C_I3.2 ; 100.152,68.809 100.229,68.885 ; 100.229,69.679 100.584,70.034 ; R_M1.2 102.5,93.375 R_MCU_5.1 ; R_I1.2 104.057,70.55 104.365,70.857 104.365,70.992 104.672,71.3 106.602,71.3 107.417,70.485 107.417,70.18 ; v4(107.417,86.817) 109.39,86.817 C_MCU_7.2@109.65,86.557 ; 107.8,73.5 C_MCU_8.2 108,72.675 108.402,72.675 109.398,71.679 ; 108.001,69.672 109.449,69.672 ; C_MCU_7.2 109.8,86.707 110.329,86.707 110.515,86.893 113.436,86.893 113.436,88.137 J1.1 116.267,90.968 116.7,90.968 D_ST1.K ; C_M1.2@89.25,93.012 C_M1.2@89.301,93.012 ; C_M1.2@89.25,93.012 C_M1.2@89.25,93.063 ; C_M1.2@89.25,93.063 C_M1.2@89.301,93.012
  L1 (SIG) w0.6: 94.923,91.516 97.257,91.516 ; 100.229,68.885 100.229,69.679
  L1 (SIG) w0.8: 91.389,70.561 91.516,70.688 94.488,70.688 95.199,71.399 ; 97.332,91.44 v4@98.374,91.44 ; v5@97.974,65.005 v5(97.993,65.024) ; v4@98.5,91.414 99.289,91.414 ; 100.125,68.809 100.152,68.809 ; 102.5,93.375 104.194,93.375 v4@104.265,93.447 ; 109.398,71.679 109.398,69.723 109.449,69.672
  L1 (SIG) w1: 91.389,70.561 88.701,70.561 87.96,69.82 87.96,66.37 88.646,65.684 88.646,64.314 89.232,63.729 94.023,63.729 94.609,64.314 94.609,65.005 v5@97.974,65.005 ; v4(91.415,75.438) 91.415,75.546 91.415,75.921 ; 92.5,92.393 92.5,95.181 v4(92.481,95.199) 92.481,96.833 SW2.1@97.012,101.364 ; 99.593,63.424 v5(97.993,65.024) 97.993,65.43 99.847,67.285 99.847,68.531 ; 103.838,93.447 104.265,93.447 v4(104.292,93.447) ; 109.449,69.672 109.449,66.472 109.474,66.446
  L4 (SIG) w0.8: v5(97.993,65.024) 97.993,64.997 98.639,64.351 98.639,63.902 99.205,63.337 108.649,63.337 108.996,63.684 109.074,63.684 v5(109.093,63.703)
  L4 (SIG) w1: P1.1@82,100.58 84.17,100.58 87.01,97.74 89.941,97.74 v4(92.481,95.199) ; v4(90.703,70.612) 90.703,74.727 v4(91.415,75.438) 95.428,79.451 95.428,87.478 v4(95.352,87.554) 98.45,90.653 v4(98.45,91.364) ; v4(107.417,86.817) 107.188,86.589 104.292,86.589 ; v5(109.423,68.936) 109.423,71.085 104.292,76.216 104.292,86.589 ; P2.5 119.438,101.14 118.078,102.5 109.361,102.5 104.292,97.432 v4(104.292,93.447) 104.292,86.589
+5V: C_USB_2.2 C_USB_3.2 FB_USB1.2 R_USB_4.1 U4.1 | length 2.4
  L1 (SIG) w0.4: R_USB_4.1 114.016,72.992 C_USB_3.2
BAR_CSB: R_BAR_1.2 U1.4 U3.20 | length 11.7
  L1 (SIG) w0.25: v1(96.012,70.485) 96.02,70.493 97.243,70.493 97.387,70.637 97.749,70.637 97.927,70.815 97.942,70.815 99.494,72.367 U3.20@99.494,74.906
  L4 (SIG) w0.25: v1(93.726,66.548) 96.012,68.834 v1(96.012,70.485)
BAR_SCK: U1.8 U3.21 | length 14.3
  L1 (SIG) w0.2: U1.8 89.95,69.125 90.548,69.723 97.572,69.723 99.994,72.146 U3.21@99.994,74.906
BAR_SDI: U1.7 U3.23 | length 16.9
  L1 (SIG) w0.2: v1(98.5,68.75) 98.5,69.03 100.5,71.03 100.5,71.247 100.994,71.741 U3.23@100.994,74.906
  L4 (SIG) w0.2: v1(91.2,68.875) 93.645,71.32 96.574,71.32 97.717,70.177 97.717,69.923 97.79,69.85 97.79,69.46 v1(98.5,68.75)
BAR_SDO: U1.6 U3.22 | length 12.2
  L1 (SIG) w0.2: v1(95.123,68.961) 97.449,68.961 100.494,72.006 U3.22@100.494,74.906
  L4 (SIG) w0.2: v1(92.456,68.961) v1(95.123,68.961)
GND: C_BAR_1.1 C_I1.1 C_I2.1 C_I3.1 C_I4.1 C_M1.1 C_M2.1 C_MCU_1.1 C_MCU_2.1 C_MCU_3.1 C_MCU_4.1 C_MCU_5.1 C_MCU_6.1 C_MCU_7.1 C_MCU_8.1 C_MCU_9.1 C_MCU_10.1 C_MCU_11.1 C_MCU_12.1 C_ST1.1 C_USB_1.1 C_USB_2.1 C_USB_3.1 C_USB_4.1 D_ST1.A D_ST2.A D_ST3.A D_ST4.A D_ST5.A D_USB_2.A D_USB_3.A D_USB_4.A J1.3 P1.2 P1.3 P1.4 P1.6 P1.7 P1.8 P1.9 P1.14 P1.15 P2.1 P2.4 R_MCU_1.2 R_MCU_2.2 R_USB_3.1 SW1.3 SW1.4 SW1.5 SW2.3 U0.A5 U0.C1 U0.C5 U0.E1 U0.E3 U1.2 U1.3 U1.5 U2.1 U2.9 U2.11 U2.18 U2.25 U3.12 U3.18 U3.63 U4.2 USB.A1 USB.A12 USB.B1 USB.B12 USB_R_1.2 USB_R_2.2 X1.2 X1.4 | length 94.4
  L1 (SIG) w0.15: 87.832,90.96 87.832,90.65 87.914,90.567 87.914,90.532 U0.E3
  L1 (SIG) w0.2: 87.832,90.96 87.832,90.996 U0.E1 88.041,91.205 88.206,91.205 ; 88.206,91.255 88.206,91.205 ; U0.C5 88.707,89.739 ; U0.C1 88.373,91.205 88.206,91.205 ; 88.707,89.644 88.707,89.739 ; U0.A5@89.027,89.916 89.027,89.789 88.977,89.739 88.707,89.739 ; U3.18@98.475,74.887 U3.18@98.494,74.906 ; 98.494,87.744 98.5,87.75 ; U2.1 101.85,68.375 101.95,68.375 cw(c101.95,68.075) 101.972,68.374 102.3,68.35 v6(103,67.7) ; v6(103,66.6) 103.275,65.95 103.275,65.6 103.275,65.5 U2.9 ; v6(104.1,66.6) 104.275,65.95 104.275,65.6 104.275,65.5 U2.11 ; v6(104.1,67.7) 104.8,68.35 105.128,68.374 cw(c105.15,68.075) 105.15,68.375 105.25,68.375 U2.18 ; U2.18@105.525,68.375 U2.18 ; U2.18@105.575,68.375 U2.18 ; U2.18@105.775,68.4 U2.18
  L1 (SIG) w0.25: P1.9@82.789,80.151 P1.9@83.039,79.901 ; C_M1.1@88.206,93.115 88.206,93.129 C_M1.1 ; 88.707,88.979 88.707,89.644 ; 94.5,79 94.744,78.756 U3.12@96.144,78.756 ; 97.4,73.38 98.13,73.38 98.475,73.725 U3.18@98.475,74.887 ; U3.63@98.494,86.106 U3.63 98.494,87.744
  L1 (SIG) w0.3: 88.206,91.255 C_M1.1@88.206,93.115 ; C_MCU_4.1@88.25,79.7 C_MCU_4.1 ; 88.707,88.42 88.707,88.979 ; C_BAR_1.1 C_BAR_1.1@91.024,65.046 ; C_MCU_5.1 93.145,86.25 93.495,85.9 93.6,85.9 C_MCU_9.1 ; C_MCU_11.1@93.175,79.9 93.275,79.8 93.275,79.649 93.3,79.624 93.3,79.4 93.607,79.093 93.607,79.043 93.757,78.893 C_MCU_12.1 ; C_MCU_12.1@93.807,79 94.5,79 ; C_MCU_6.1@97.25,72.5 97.4,72.65 97.4,73.38 ; C_MCU_10.1 97.729,88.243 98.494,87.744 ; SW1.4 103.144,99.606 104.77,97.98 ; SW1.5@104.77,97.556 104.895,97.431 SW1.5 ; C_ST1.1 105.25,97.375 SW1.5 ; SW1.5@105.618,97.556 105.493,97.431 SW1.5 ; 105.618,97.98 107.244,99.606 SW1.3
  L1 (SIG) w0.4: X1.4@88.293,77.513 88.643,77.863 X1.4@88.643,77.763 ; U1.2 U1.3 92.55,66.775 92.55,67.026 93.6,68.076 93.6,68.775 U1.5 ; C_M2.1 91.617,90.813 92.857,89.573 93.307,89.573 v1(93.345,89.535)
  L1 (SIG) w0.5: v3(85.065,76.733) 85.103,76.695 85.511,76.695 86.543,75.663 X1.2 ; v8(85.7,80.95) 85.757,81.007 85.757,81.7 86.666,82.609 R_MCU_1.2 ; C_M1.1 88.22,94.289 88.392,94.461 v7(88.392,94.488) ; C_MCU_4.1@88.25,79.7 88.255,79.65 88.255,78.263 X1.4 ; C_MCU_4.1 v8(88.725,80.425) ; v7@88.754,87.649 88.754,88.373 ; C_MCU_3.1 90.752,78.248 90.752,77.015 v1(90.754,77.013) ; v3(90.805,85.598) 90.843,85.636 90.843,85.903 91.19,86.25 C_MCU_5.1 ; U1.2 91.2,66.425 90.92,66.145 C_BAR_1.1 92.047,65.15 92.148,65.049 v3(92.202,65.049) ; SW2.3@92.025,101.727 SW2.3 92.262,101.727 v3(93.447,101.727) ; C_MCU_11.1@93.175,80.005 94.305,80.005 v9(94.31,80.01) ; v3(96.1,72.5) C_MCU_6.1@97.25,72.5 ; C_MCU_10.1 97.629,88.468 v1(98.679,88.468) ; v9(100.457,64.897) 100.476,64.878 100.797,64.878 101.7,63.975 101.7,63.925 C_I3.1@101.75,63.875 ; v3(101.875,99.6) 102.944,99.6 SW1.4 SW1.3 107.244,99.706 107.444,99.906 108.154,99.906 108.523,100.275 v1(108.55,100.275) ; SW1.5@104.77,97.556 104.77,97.98 ; SW1.5@105.618,97.556 105.618,97.98 ; C_I2.1@105.877,63.902 105.884,63.909 106.909,63.909 107.237,64.237 v1(107.264,64.237) ; C_I4.1 106.165,70.45 106.165,70.4 106.801,69.764 106.801,69.285 v1(106.782,69.266) ; C_MCU_2.1@106.75,72.5 106.75,72.393 107.368,71.775 107.9,71.775 C_MCU_8.1 107.95,71.687 107.962,71.675 107.962,70.857 108.28,70.539 v11(108.28,70.485) ; C_I1.1 106.857,67.353 107.379,67.875 107.982,67.875 v1(108.001,67.894) ; R_MCU_2.2 107.34,92.193 107.39,92.193 108.007,92.811 108.007,93.504 v1(108.026,93.523) ; v1(108.687,88.392) 108.706,88.373 108.985,88.373 109.7,87.657 C_MCU_7.1 ; C_MCU_1.1 109.9,85.35 110.76,85.35 111.198,84.912 v3(111.252,84.912) ; D_ST2.A 111.021,89 111.071,88.95 111.071,88.244 111.506,87.809 v1(111.506,87.782) ; D_ST3.A 111.071,93.7 J1.3 J1.3@113.81,93.59 ; D_ST5.A 111.021,98.45 111.071,98.45 111.588,97.933 111.588,97.454 v1(111.608,97.434) ; v3(112.547,79.604) 112.586,79.642 112.586,79.836 113.3,80.55 113.35,80.55 D_USB_3.A 113.5,80.593 114.85,80.593 USB_R_1.2 ; D_USB_4.A 113.453,84.497 114.059,85.103 114.059,85.814 v3(114.097,85.852) ; R_USB_3.1@116.45,68.477 116.474,68.453 R_USB_3.1@116.492,68.453 ; D_ST4.A@116.475,96.7 D_ST4.A 116.475,95.602 116.825,95.252 v10(116.825,95.225) ; D_ST1.A 116.8,92.018 117.43,92.648 117.43,93.199 v1(117.45,93.218)
  L4 (SIG) w0.25: P1.4@82.789,92.851 P1.4@83.048,92.592
  L4 (SIG) w0.5: P2.1 P2.1@119.873,90.878 ; P2.1@119.873,90.85 P2.1@119.873,90.878 ; P2.1@119.873,91.319 P2.1@119.873,90.878 ; P2.1@120,90.83 P2.1@119.873,90.878
  other v1: 117.602,63.551 116.51,63.627 96.444,63.729 116.205,69.139 117.577,71.018 116.256,71.653 117.45,73.838 107.442,75.286 117.526,75.514 114.478,76.683 113.716,78.029 102.845,78.181 99.568,78.232 113.97,79.299 102.235,82.347 99.441,82.398 106.68,85.344 96.698,86.106 91.288,98.755 97.993,98.755
  other v2: 84,64 85,66 86,68 112,68 85,70 97,74 90,76 85,78 101,78 98,80 100,80 102,80 85,82 101,82 84,84 98,84 100,84 102,84 85,86 86,88 85,90 107,90 84,92 106,92 112,92 85,94 87,94 91,94 101,94 86,96 88,96 90,96 96,96 98,96 85,98 97,98 99,98 101,98 88,100 90,100 92,100 94,100 98,100 100,100
  other v3: 116.332,88.544 117.246,89.433
  other v4: 117.45,65.481 113.233,70.917
  other v7: 88.773,87.63
IMU_CPOUT: C_I4.2 U2.20 | length 1.7
  L1 (SIG) w0.25: U2.20 104.3,69.685 104.49,69.875 104.54,69.875 105.115,70.45 C_I4.2
IMU_INT: U2.12 U3.28 | length 15.1
  L1 (SIG) w0.25: v1(101.75,71.75) 101.75,72.634 102.241,73.125 102.785,73.125 103.485,73.825 103.485,74.896 U3.28@103.494,74.906 ; U2.12 104.849,65.175 104.85,65.176 v1(106.705,65.176)
  L4 (SIG) w0.25: v1(101.75,71.75) 101.75,70.35 103.825,68.275 104.338,68.275 105.615,66.998 105.615,66.089 106.051,65.653 106.228,65.653 v1(106.705,65.176)
IMU_REGOUT: C_I2.2 U2.10 | length 1.9
  L1 (SIG) w0.25: U2.10 103.8,64.598 103.973,64.425 104.24,64.425 104.534,64.131 104.659,64.131 104.796,63.994 C_I2.2@104.796,63.869
IMU_SCL: R_I1.1 U2.23 U3.29 | length 7.8
  L1 (SIG) w0.25: v7@102.75,72.5 103.985,73.735 103.985,74.896 U3.29@103.994,74.906 ; U2.23 102.8,70.193 103.057,70.45 103.057,70.55 103.197,70.689 103.197,70.997 v1(103.95,71.75)
  L4 (SIG) w0.25: v7(102.5,72.5) 102.567,72.433 103.267,72.433 v1(103.95,71.75)
IMU_SDA: R_I2.1 U2.24 U3.30 | length 6.9
  L1 (SIG) w0.25: U2.24 102.3,69.375 102.073,69.602 102,69.675 R_I2.1 102.121,70.621 102.121,71.015 104.494,73.388 U3.30@104.494,74.906
LED_PWR_K: D_USB_1.K R_USB_3.2 | length 1.5
  L1 (SIG) w0.3: D_USB_1.K@117.467,67.005 117.48,67.018 117.48,68.44 R_USB_3.2@117.492,68.453
MAG_INT: R_M3.2 U0.D4 U3.61 | length 18.3
  L1 (SIG) w0.15: 87.641,90.239 U0.D4
  L1 (SIG) w0.2: v1(86.741,90.17) 86.81,90.239 87.641,90.239
  L1 (SIG) w0.25: v1(89.869,88.5) R_M3.2 94.5,88.5 95.25,89.25 99,89.25 99.494,88.756 U3.61 U3.61@99.494,86.106
  L4 (SIG) w0.25: v1(86.741,90.17) 87.419,89.492 87.419,89.111 88.03,88.5 v1(89.869,88.5)
MAG_SCL: R_M1.1 U0.A3 U3.58 | length 19.9
  L1 (SIG) w0.15: U0.A3 89.339,90.805 v1(90.424,90.805)
  L1 (SIG) w0.25: v1(95,92.5) R_M1.1 101.5,89.992 100.994,89.487 U3.58@100.994,86.106
  L4 (SIG) w0.25: v1(90.424,90.805) 92.119,92.5 v1(95,92.5)
MAG_SDA: R_M2.1 U0.B4 U3.59 | length 16.6
  L1 (SIG) w0.15: U0.B4 89.721,90.239
  L1 (SIG) w0.2: 89.721,90.239 89.974,90.239 v1(90.551,89.662)
  L1 (SIG) w0.25: v1(95,90.5) 99.719,90.5 99.75,90.5 R_M2.1 100.485,90.408 100.485,86.115 100.494,86.106 U3.59@100.497,86.109
  L4 (SIG) w0.25: v1(90.551,89.662) 91.389,90.5 v1(95,90.5)
MCU_LED_R_A: D_MCU_1.A U3.2 | length 6.9
  L1 (SIG) w0.25: D_MCU_1.A@89.298,83.947 89.298,83.931 89.473,83.756 U3.2@96.144,83.756
MCU_LED_R_K: D_MCU_1.K R_MCU_1.1 | length 1.7
  L1 (SIG) w0.25: R_MCU_1.1@86.716,83.668 D_MCU_1.K@88.4,83.668
MCU_LED_Y_A: D_MCU_2.A U3.52 | length 4.7
  L1 (SIG) w0.2: U3.52 103.994,88.221 105.599,89.826 105.599,89.876 105.799,90.076 D_MCU_2.A
MCU_LED_Y_K: D_MCU_2.K R_MCU_2.1 | length 1.5
  L1 (SIG) w0.5: D_MCU_2.K 107.173,91.076 107.24,91.143 R_MCU_2.1
MCU_NRST: C_ST1.2 R_MCU_5.2 R_ST3.2 SW1.1 SW1.2 U3.7 | length 45.9
  L1 (SIG) w0.25: v1(93.98,81.026) 94.818,81.026 95.047,81.256 U3.7@96.144,81.256 ; v1(101.5,96) 102.075,95.425 102.325,95.425 R_MCU_5.2
  L1 (SIG) w0.3: R_MCU_5.2 C_ST1.2@105.1,95.25 ; 103.144,97.255 C_ST1.2@104.999,95.4 ; C_ST1.2 105.3,95.25 105.65,95.6 105.701,95.6 107.244,97.143 ; SW1.1 107.244,98.106 107.888,98.75 108.174,98.75 108.424,99 v1(108.5,99) ; R_ST3.2@115.85,99.975 115.875,99.975 116.643,100.743 116.643,101.068 v1(116.7,101.125)
  L1 (SIG) w0.5: 103.144,97.255 SW1.2 ; 107.244,97.143 SW1.1
  L4 (SIG) w0.25: v1(93.98,81.026) 93.98,83.505 93.25,84.235 93.25,87 97,90.75 97,93.75 99.25,96 v1(101.5,96)
  L4 (SIG) w0.3: v1(108.5,99) 109.2,99.7 115.125,99.7 115.571,100.146 115.571,100.693 115.95,101.072 116.647,101.072 v1(116.7,101.125)
MCU_OSC_IN: C_MCU_4.2 U3.5 X1.1 | length 12.8
  L1 (SIG) w0.2: 92.756,82.256 U3.5@96.144,82.256
  L1 (SIG) w0.25: X1.1 86.543,78.993 87.25,79.7 C_MCU_4.2 87.425,79.925 87.425,81.175 87.75,81.5 92,81.5 92.756,82.256
MCU_OSC_OUT: R_MCU4.2 U3.6 | length 6.9
  L1 (SIG) w0.25: R_MCU4.2 90.75,80.5 91,80.75 92,80.75 93.006,81.756 U3.6@96.144,81.756
MCU_SWCLK: R_ST1.2 U3.49 | length 8.9
  L1 (SIG) w0.25: U3.49@105.494,86.106 105.504,86.115 105.504,87.396 105.535,87.427 105.535,87.439 110.421,92.325 110.825,92.325 R_ST1.2
MCU_SWDIO: R_ST2.2 U3.46 | length 18.9
  L1 (SIG) w0.25: U3.46 109.12,83.281 109.174,83.275 111.468,83.275 111.549,83.356 112.267,84.221 112.325,84.29 112.325,84.418 111.805,86.135 111.332,86.135 v1(111.328,86.131) ; v4(109.296,94.971) 109.27,95.12 109.27,95.22 109.859,96.066 R_ST2.2
  L4 (SIG) w0.25: v4@109.117,94.74 v4(109.296,94.971) 110.712,87.927 110.712,86.747 v1(111.328,86.131)
MCU_SWO: R_ST4.2 U3.55 | length 19.5
  L1 (SIG) w0.25: U3.55@102.494,86.106 102.494,89.994 109.625,97.125 109.625,100.691 110.759,101.825 110.825,101.825 R_ST4.2
NetC_MCU_12_2: C_MCU_12.2 FB_MCU.2 U3.13 | length 4
  L1 (SIG) w0.25: 94.5,78 94.756,78.256 U3.13@96.144,78.256
  L1 (SIG) w0.3: C_MCU_12.2@93.75,78 94.5,78
  L1 (SIG) w0.4: FB_MCU.2 92.6,77.293 93.307,78 C_MCU_12.2@93.75,78
NetD_ST5_K: D_ST5.K J1.6 R_ST4.1 | length 4.4
  L1 (SIG) w0.4: D_ST5.K 110.986,99.514 R_ST4.1@110.986,100.986 ; R_ST4.1@111.2,100.85 R_ST4.1@111.058,100.992 ; J1.6 111.15,101 R_ST4.1@111.058,100.992 ; R_ST4.1@110.986,100.986 111.001,100.987 R_ST4.1@111.058,100.992 ; R_ST4.1@110.986,100.986 R_ST4.1 111.05,101 R_ST4.1@111.058,100.992
NetR_MCU_3_1: R_MCU_3.1 SW2.2 | length 5.6
  L1 (SIG) w0.25: 96,95 R_MCU_3.1
  L1 (SIG) w0.3: 95.75,95 96,95
  L1 (SIG) w0.4: SW2.2 94.726,95 95.75,95
NetR_MCU_3_2: R_MCU_3.2 U3.60 | length 9.4
  L1 (SIG) w0.25: v1(98.75,93.5) 98.817,93.567 99.067,93.567 99.432,93.932 99.932,93.932 R_MCU_3.2 ; v1(99.75,89.5) 99.75,89.405 99.994,89.161 U3.60@99.994,86.106
  L4 (SIG) w0.25: v1(98.75,93.5) 99.75,92.5 v1(99.75,89.5)
NetR_USB_4_2: R_USB_4.2 U4.3 | length 3.3
  L1 (SIG) w0.3: R_USB_4.2 112.039,69.951 112.233,69.757 112.595,69.757 112.75,69.602 U4.3@112.75,69.241
NetUSB_A5: USB.A5 USB_R_1.1 | length 2.6
  L1 (SIG) w0.2: USB_R_1.1 116.9,80.5 117.45,81.05 USB.A5
NetUSB_B5: USB.B5 USB_R_2.1 | length 5
  L1 (SIG) w0.2: USB_R_2.1 115.872,87.359 115.672,87.159 115.672,85.827 116.23,85.268 116.586,85.268 117.525,84.329 117.525,84.276 117.701,84.1 118.225,84.1 USB.B5
NRST: D_ST4.K J1.5 R_ST3.1 | length 4.4
  L1 (SIG) w0.4: J1.5 113.702,98.304 113.816,98.191 D_ST4.K@116.166,97.713 ; R_ST3.1@115.925,99.075 115.925,98.2 116.289,97.836 D_ST4.K@116.475,97.65
PA0: P1.10 U3.14 | length 17.9
  L1 (SIG) w0.2: 94.419,77.103 95.047,77.731 U3.14@95.184,77.731 ; U3.14@95.199,77.746 U3.14@96.135,77.746
  L1 (SIG) w0.25: P1.10@82,77.72 85.83,73.75 91.75,73.75 94.419,76.419 94.419,77.103
PA1: P1.11 U3.15 | length 17.5
  L1 (SIG) w0.2: 94.769,76.953 95.047,77.231 95.184,77.231 95.199,77.246 96.135,77.246 U3.15@96.142,77.254
  L1 (SIG) w0.25: P1.11@82,75.18 84.04,73 91.888,73 94.769,75.881 94.769,76.953
PA2: P1.12 U3.16 | length 16.6
  L1 (SIG) w0.25: P1.12@82.255,72.38 92.275,72.25 92.38,72.25 96.144,76.014 U3.16@96.144,76.756 ; P1.12@82.789,72.671 82.971,72.484 P1.12@83.044,72.411
PA3: P1.13 U3.17 | length 18
  L1 (SIG) w0.25: P1.13@82,70.1 83.519,71.5 93.25,71.5 96.656,74.906 U3.17@97.994,74.906
PA9: P2.2 U3.42 | length 21.4
  L1 (SIG) w0.2: U3.42@107.344,81.256 108.749,81.256
  L1 (SIG) w0.25: 108.749,81.256 109.893,80.112 v1(111.481,80.112)
  L4 (SIG) w0.25: v1(111.481,80.112) 111.481,82.017 115.291,85.827 115.291,88.591 119.342,92.642 119.342,93.262 P2.2
PA10: P2.3 U3.43 | length 23.4
  L1 (SIG) w0.2: U3.43 108.969,81.781
  L1 (SIG) w0.25: 108.969,81.781 109.724,81.026 110.769,81.026 v1(110.82,81.077)
  L4 (SIG) w0.25: v1(110.82,81.077) 110.82,82.11 110.6,82.331 110.6,83.27 112.003,84.673 cw(c139.241,84.673) 112.011,85.34 112.012,85.346 112.198,87.911 112.238,88.886 112.271,88.919 112.856,89.504 112.93,89.578 114.071,89.578 114.148,89.654 115.307,90.891 115.375,90.963 115.375,92.151 115.418,92.197 115.448,92.227 119.281,96.06 P2.3
PB13: P3.1 U3.34 | length 19.9
  L1 (SIG) w0.2: U3.34@107.354,77.246 108.504,77.246
  L1 (SIG) w0.25: 108.504,77.246 109.499,76.251 v1(109.499,72.923)
  L4 (SIG) w0.25: v1(109.499,72.923) 109.499,72.034 116.874,64.66 P3.1
PB14: P3.2 U3.35 | length 19
  L1 (SIG) w0.25: U3.35@107.344,77.756 108.944,77.756 110.261,76.439 v1(110.261,73.838)
  L4 (SIG) w0.25: v1(110.261,73.838) 110.261,72.339 115.401,67.2 P3.2
PB15: P3.3 U3.36 | length 16.8
  L1 (SIG) w0.25: U3.36@107.344,78.256 109.244,78.256 111.1,76.4 111.1,74.803 v1(111.049,74.752)
  L4 (SIG) w0.25: v1(111.049,74.752) 115.428,70.373 116.743,70.373 116.891,70.225 116.897,70.225 117.382,69.74 P3.3
PC6: P3.4 U3.37 | length 16
  L1 (SIG) w0.25: U3.37@107.344,78.756 109.844,78.756 111.811,76.789 v1(111.811,76.073)
  L4 (SIG) w0.25: v1(111.811,76.073) 111.811,75.032 114.562,72.28 P3.4
PC7: P3.5 U3.38 | length 14.9
  L1 (SIG) w0.25: U3.38@107.344,79.258 107.367,79.281 110.787,79.281 v1(112.141,77.927)
  L4 (SIG) w0.25: v1(112.141,77.927) 112.141,76.627 113.948,74.82 P3.5
PC15: P1.5 U3.4 | length 17.9
  L1 (SIG) w0.2: 91.781,82.781 U3.4
  L1 (SIG) w0.25: v1(91.25,82.25) 91.781,82.781
  L4 (SIG) w0.25: P1.5@82,90.42 90.03,82.25 v1(91.25,82.25) v1@91.183,82.317
SWCLK: D_ST2.K J1.2 R_ST1.1 | length 4.6
  L1 (SIG) w0.3: D_ST2.K D_ST2.K@110.986,90.014 ; R_ST1.1@110.986,91.486 R_ST1.1 ; J1.2@113.252,90.69 J1.2@113.596,90.69
  L1 (SIG) w0.4: D_ST2.K 111.121,90.1 J1.2 ; D_ST2.K@110.986,90.014 R_ST1.1@110.986,91.486
SWDIO: D_ST3.K J1.4 R_ST2.1 | length 4.1
  L1 (SIG) w0.25: D_ST3.K 111.167,94.925 111.167,96.066 111.153,96.153 R_ST2.1 ; R_ST2.1@111.151,96.154 111.19,96.15 J1.4
USB_N: D_USB_3.K U3.44 USB.A7 USB.B7 | length 17.7
  L1 (SIG) w0.26: U3.44 108.244,82.281 cw(c108.34,82.039) 108.34,82.299 ccw(c108.34,82.763) U3.44@108.342,82.299 ; U3.44@108.343,82.299 113.139,82.317 ; 113.14,82.317 ccw(c113.139,82.78) 113.141,82.317 ; D_USB_3.K 113.401,81.77 113.401,82.057 ccw(c113.141,82.057) 113.141,82.317 ; v1(116.325,84.475) 117.25,83.55 USB.A7 ; v1(116.652,81.825) 116.587,81.89 116.587,82.186 116.476,82.298 116.476,82.49 ; USB.B7@117.97,82.569 ccw(c117.969,82.308) 117.956,82.568 116.476,82.49 ; USB.B7@117.971,82.569 cw(c117.969,82.308) 117.986,82.568 USB.B7 ; 113.141,82.317 ccw(c113.139,82.78) 113.162,82.317 113.697,82.344 ccw(c113.661,83.066) 113.699,82.344 116.476,82.49
  L4 (SIG) w0.26: v1(116.325,84.475) 116.325,82.646 116.587,82.383 116.587,81.89 v1(116.652,81.825)
USB_P: D_USB_4.K U3.45 USB.A6 USB.B6 | length 17.7
  L1 (SIG) w0.26: U3.45 108.244,82.781 ccw(c108.34,83.023) 108.34,82.763 cw(c108.34,82.299) 108.341,82.763 113.134,82.78 ccw(c113.133,83.04) 113.145,82.78 113.167,82.782 ; 113.139,82.78 113.167,82.782 ; D_USB_4.K 113.401,83.327 113.401,83.04 cw(c113.141,83.04) 113.167,82.782 ; v1(115.401,83.524) 115.401,82.898 ; v1(115.494,81.788) 115.494,81.732 116.046,81.18 116.229,81.18 116.239,81.17 116.761,81.17 116.766,81.175 116.893,81.175 117.291,81.573 117.291,81.632 117.688,82.03 118.255,82.03 USB.A6 ; USB.B6 117.992,83.032 cw(c117.976,83.292) 117.974,83.032 ccw(c117.969,82.308) 117.931,83.031 117.916,83.03 117.825,83.03 ccw(c117.825,82.7) 117.749,83.021 115.401,82.898 ; 113.167,82.782 113.674,82.806 115.401,82.898
  L4 (SIG) w0.26: v1(115.401,83.524) 115.448,83.477 115.448,81.834 v1(115.494,81.788)
VBUS: C_USB_1.2 D_USB_2.K FB_USB1.1 USB.A4 USB.A9 USB.B4 USB.B9 | length 7.7
  L4 (SIG) w1: v5(116.459,79.273) 117.652,80.467 117.652,85.141 v5(116.688,86.106)
VCAP1: C_MCU_2.2 U3.31 | length 2.5
  L1 (SIG) w0.2: 104.994,73.506 105,73.5
  L1 (SIG) w0.25: 104.994,73.506 U3.31@104.994,74.906
  L1 (SIG) w0.3: 105,73.5 105,72.75 C_MCU_2.2@105.25,72.5
VCAP2: C_MCU_1.2 U3.47 | length 2.5
  L1 (SIG) w0.2: U3.47@107.344,83.75 108.75,83.75
  L1 (SIG) w0.3: 108.75,83.75 109,83.75
  L1 (SIG) w0.4: 109,83.75 109.05,83.8 109.55,83.8 C_MCU_1.2
XTAL_IN: C_MCU_3.2 R_MCU4.1 X1.3 | length 4.6
  L1 (SIG) w0.25: X1.3 88.443,75.663 89.75,76.971 C_MCU_3.2 R_MCU4.1
  L1 (SIG) w0.4: X1.3@88.643,75.563 X1.3@88.643,75.663
pads on no net: U0.D2 U2.2 U2.3 U2.4 U2.5 U2.6 U2.7 U2.14 U2.15 U2.16 U2.17 U2.19 U2.21 U2.22 U3.3 U3.8 U3.9 U3.10 U3.11 U3.24 U3.25 U3.26 U3.27 U3.39 U3.40 U3.41 U3.50 U3.51 U3.53 U3.54 U3.56 U3.57 U3.62 U4.4 USB.1 USB.2 USB.3 USB.4 USB.5 USB.6 USB.A8 USB.B8

## Polygon pours and split planes (outlines as drawn)
GND on L1 (SIG) "GND_L01_P012" (solid, pour order 12): 117.825,79.68 117.475,79.33 117.259,78.702 117.348,78.791 117.04,78.702 116.942,78.024 117.119,77.216 117.119,76.042 116.942,75.692 116.746,73.675 115.7,73.675 115.748,69.037 115.76,67.831 116.942,67.831 116.942,68.846 118.085,70.104 118.008,75.87 118.008,76.632 117.676,76.964 117.789,78.35 117.825,78.801 119.05,78.801 119.05,79.85 117.825,79.85
+3V3 on L1 (SIG) "+3V3_L01_P019" (solid, pour order 19): 110.896,65.583 110.871,65.608 110.607,67.168 108.306,67.168 107.874,63.119 108.052,62.941 115.468,62.941 115.468,67.843 115.443,67.869 115.418,67.843 113.69,67.843 113.69,65.583
VBUS on L1 (SIG) "VBUS_L01_P001" (solid, pour order 1): 117.825,85.743 116.688,86.881 116.688,86.893 116.561,86.893 115.951,86.284 115.951,86.055 116.611,85.395 116.84,85.395 117.373,84.861 118.948,84.861 118.948,85.743
GND on L1 (SIG) "GND_L01_P020" (solid, pour order 20): 115.926,66.065 115.976,66.015 115.976,63.094 117.78,63.094 117.983,63.297 117.983,66.04
GND on L1 (SIG) "GND_L01_P018" (solid, pour order 18): 113.36,68.377 113.386,68.351 114.021,68.351 114.021,70.993 113.563,71.45 112.624,71.45 112.624,70.764 113.335,70.053 113.335,69.875
+5V on L1 (SIG) "+5V_L01_P002" (solid, pour order 2): 113.475,73.375 113.475,72.45 113.475,71.55 114.175,71.55 114.25,71.475 114.25,68.3 115.025,68.3 115.05,68.325 115.05,71.525 115.175,71.65 115.175,73.85 116.65,73.85 116.7,73.9 116.7,74.975 113.775,74.975 113.775,73.7 113.475,73.7
GND on L1 (SIG) "GND_L01_P017" (solid, pour order 17): 116.091,87.947 116.649,87.389 116.764,87.173 117.797,86.043 117.79,85.76 118.745,85.897 118.745,86.716 117.815,86.716 117.438,88.379 117.729,89.14 117.729,89.95 117.065,89.973 115.418,88.773 115.443,87.96
GND on L1 (SIG) "GND_L01_P015" (solid, pour order 15): 115.037,77.902 115.037,78.588 115.011,79.756 113.259,79.756 113.233,77.851 113.899,76.936 113.868,75.413 115.113,75.413 115.087,77.902
GND on L1 (SIG) "GND_L01_P008" (solid, pour order 8): 117.6,73.675 117.775,70.125 116.972,70.149 116.312,70.81 115.725,71.6 115.7,73.675
VBUS on L1 (SIG) "VBUS_L01_P000" (solid, pour order 0): 117.183,79.21 117.545,79.572 117.77,79.845 118.77,79.845 118.77,80.745 117.545,80.745 116.559,79.9 115.17,79.751 115.17,78.42 115.195,78.395 115.445,78.395 115.445,76.57 115.345,76.47 115.345,75.37 116.645,75.37 ccw(c113.309,76.752) 116.719,77.938 ccw(c114.917,78.503) 116.788,78.763 ccw(c116.856,78.733) 116.886,78.665 ccw(c116.939,78.736) 116.991,78.665 ccw(c116.984,78.713) 117.032,78.706 ccw(c112.642,78.753) 117.032,78.801 ccw(c116.898,78.844) 117.031,78.893 ccw(c116.44,79.108) 117.069,79.096 ccw(c116.782,79.497)
GND on L3 (GND) "GND_L03_P023" (solid, pour order 23): 119.741,103.001 cw(c119.741,101.226) 121.516,101.226 121.516,90.951 cw(c119.691,90.951) 119.691,89.126 119.641,89.126 ccw(c119.641,88.526) 119.041,88.526 119.041,77.076 ccw(c119.616,77.076) 119.616,76.501 119.841,76.501 cw(c119.841,74.826) 121.516,74.826 121.516,64.476 cw(c119.616,64.476) 119.616,62.576 82.541,62.576 ccw(c82.541,62.551) 82.516,62.551 82.516,62.576 82.266,62.576 cw(c82.266,64.201) 80.641,64.201 80.641,101.101 cw(c82.541,101.101) 82.541,103.001 ccw(c82.519,101.124) 80.641,101.101 cw(c82.541,101.101) 82.541,103.001
GND on L2 (GND) "GND_L02_P022" (solid, pour order 22): 119.725,103 cw(c119.725,101.225) 121.5,101.225 121.5,90.95 cw(c119.675,90.95) 119.675,89.125 119.625,89.125 ccw(c119.625,88.525) 119.025,88.525 119.025,77.075 ccw(c119.6,77.075) 119.6,76.5 119.825,76.5 cw(c119.825,74.825) 121.5,74.825 121.5,64.475 cw(c119.6,64.475) 119.6,62.575 82.525,62.575 ccw(c82.525,62.55) 82.5,62.55 82.5,62.575 82.25,62.575 cw(c82.25,64.2) 80.625,64.2 80.625,101.1 cw(c82.525,101.1) 82.525,103 ccw(c82.502,101.123) 80.625,101.1 cw(c82.525,101.1) 82.525,103

## Silkscreen, mask and mechanical layers (free items; w line width, h text height)
Top Overlay:
  region: 197 vertices and 0 holes, not listed, extent 84.494,95.744 88.892,100.142
  text "NRST" at 102.679,101.229 h1.52
  text "L" at 89.004,100.904 h1.52
  text "H" at 99.079,100.904 h1.52